# Altium PCB PCB3.PcbDoc (part 1 of 2)
Units mm, origin at the board's own origin, x right, y up, seen from the top; angles counter-clockwise.
Board outline 110 x 86 mm, 4 copper layers (Top Layer, Signal Layer 1, Signal Layer 2, Bottom Layer), stack 1.466 mm thick; 201 components, 102 nets, 1236 pads, 354 vias.
Unrouted connection lines stored in the file: 1.
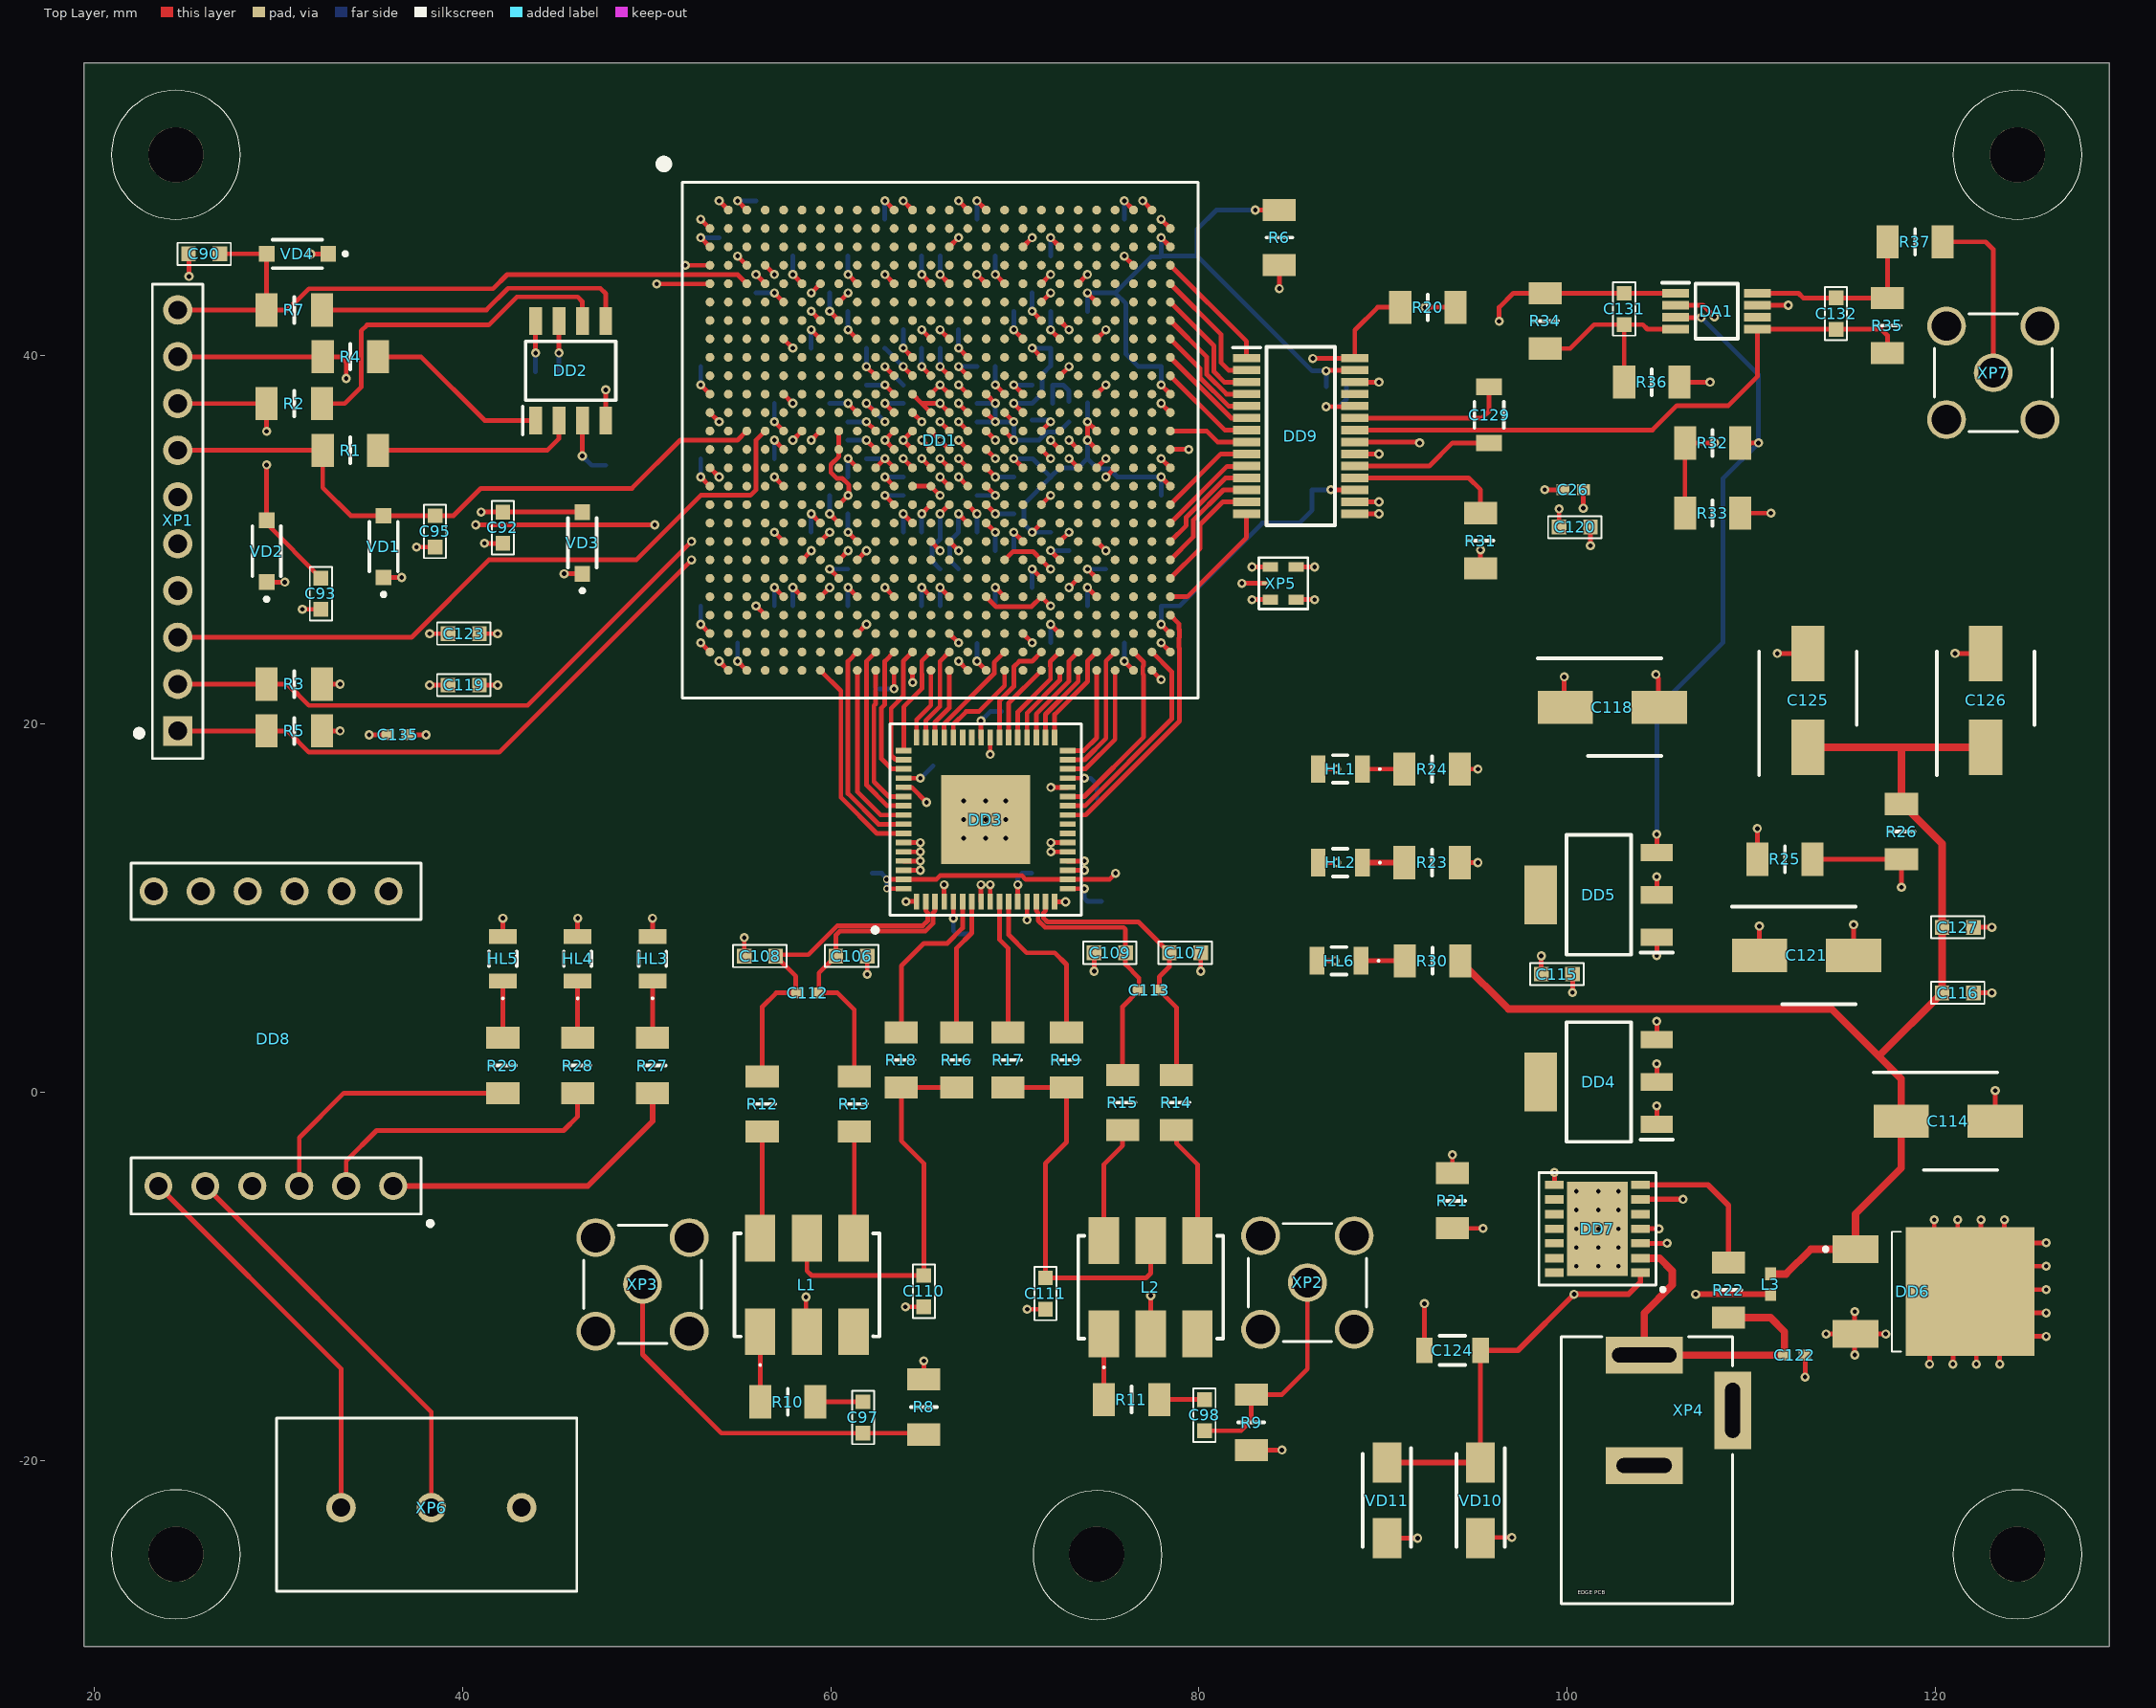
[diagram p0: Top Layer view]
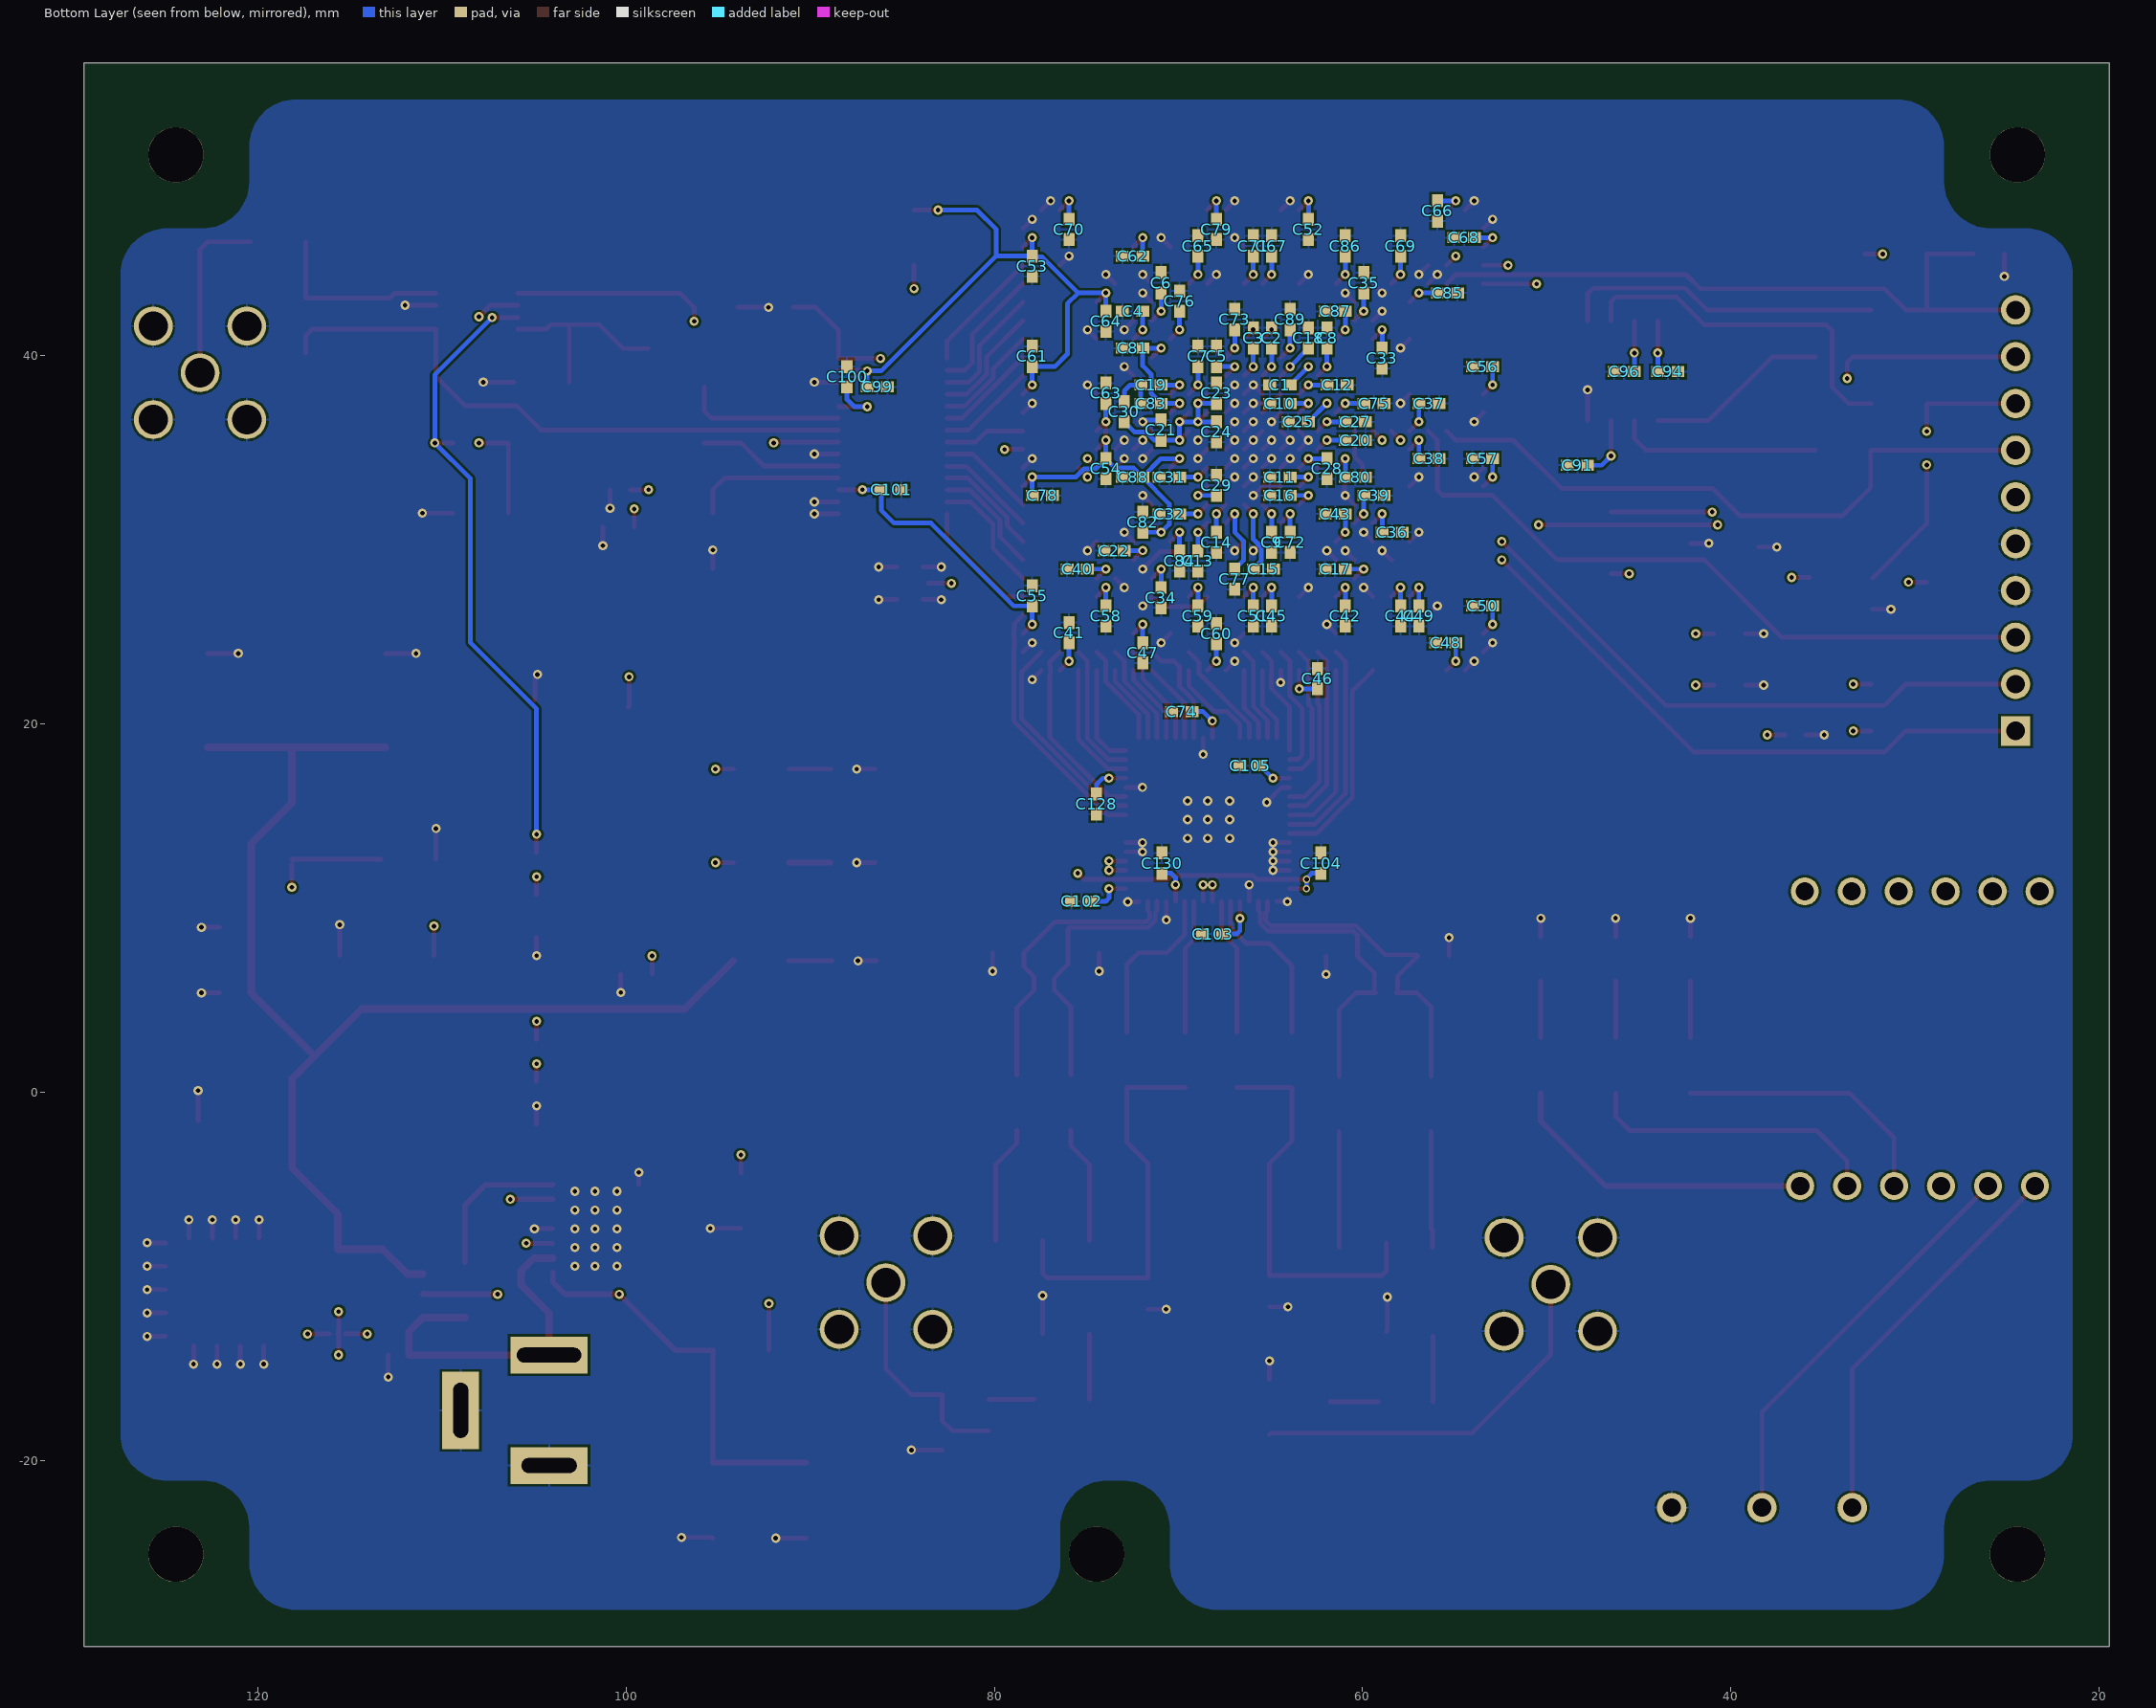
[diagram p1: Bottom Layer view, seen from below]
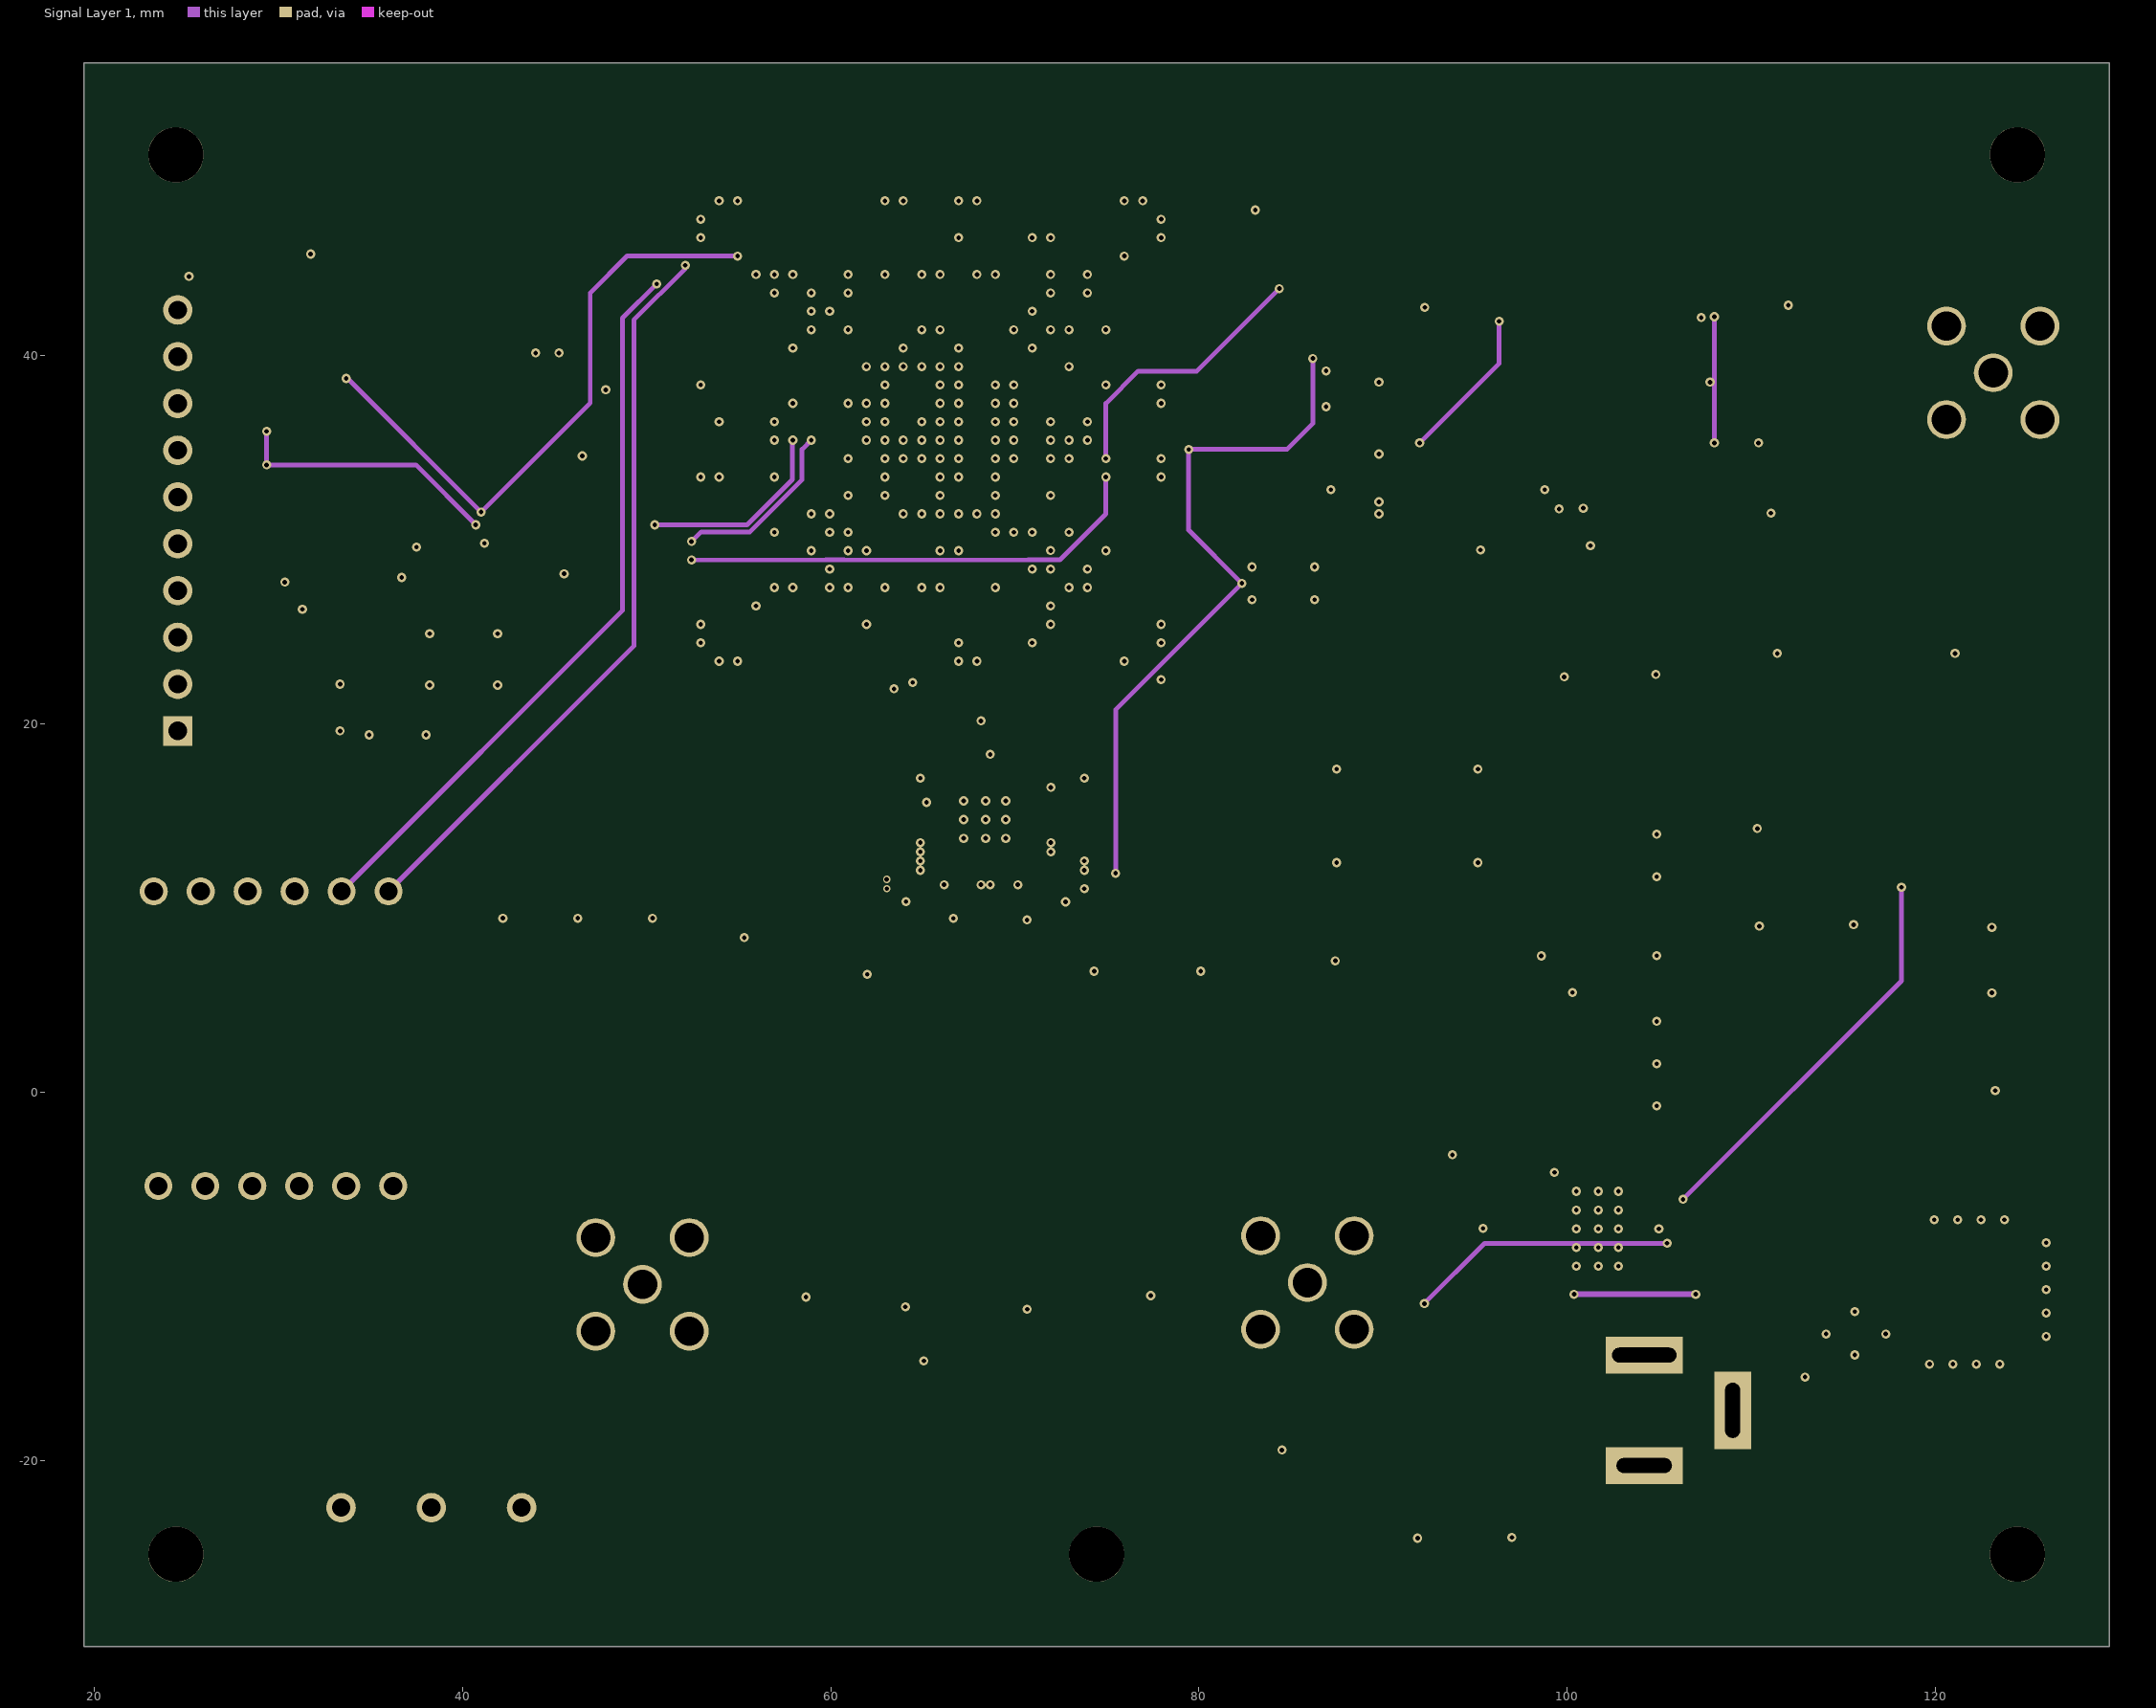
[diagram p2: Signal Layer 1]
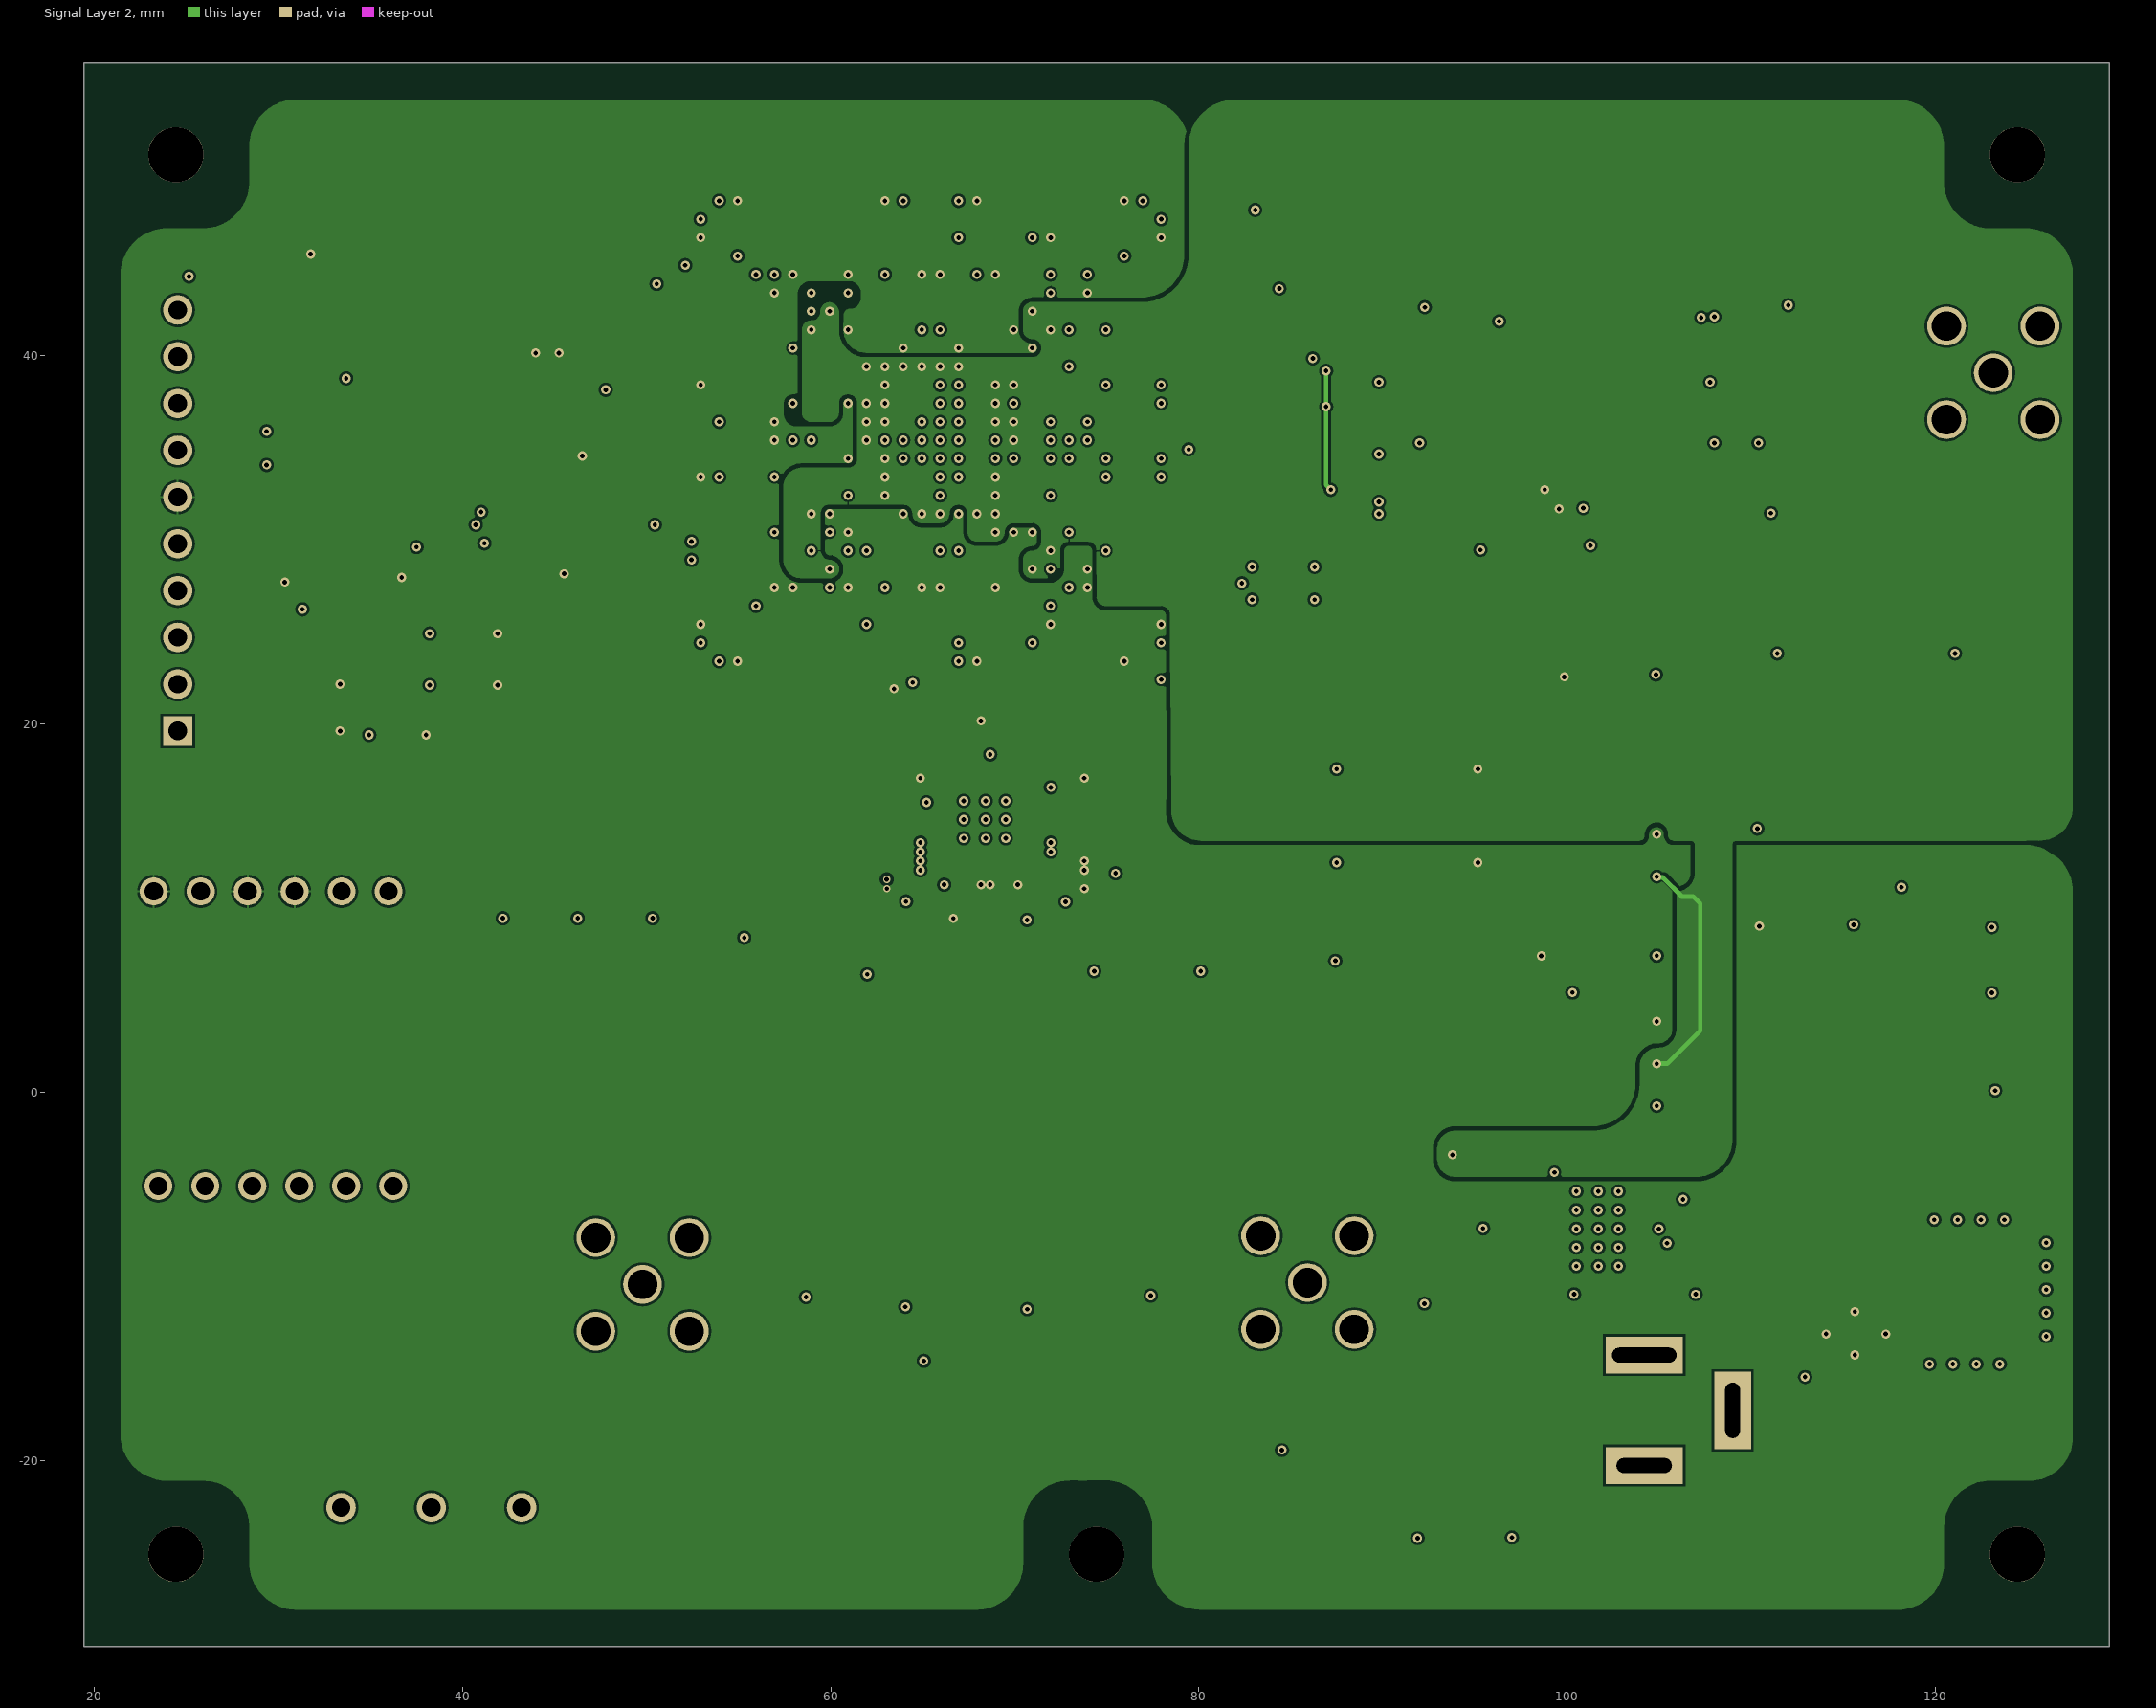
[diagram p3: Signal Layer 2]

## Layer stack, top to bottom
Top Solder: solder mask 0.015, Solder Resist, Dk 3.5
Top Layer: signal copper 0.018
Dielectric 1: prepreg 0.115, TG150, Dk 4.2
Signal Layer 1: signal copper 0.018
Dielectric 2: core 1.164, FR-4, Dk 4.2
Signal Layer 2: signal copper 0.018
Dielectric 3: prepreg 0.115, TG150, Dk 4.2
Bottom Layer: signal copper 0.018
Bottom Solder: solder mask 0.015, Solder Resist, Dk 3.5

## Board outline
19.44,-30.092 19.44,55.908 129.44,55.908 129.44,-30.092

## Design rules (kind name [scope] priority, off if disabled: settings)
BoardOutlineClearance [All] p1: gap=0.2 ignorepadtopadclearanceinfootprint=FALSE
Clearance [All] p1: gap=0.127 ignorepadtopadclearanceinfootprint=FALSE except(0.25: Arc-Hole Track-Hole SMDPad-Hole THPad-Hole Via-Hole Fill-Hole Poly-Hole Region-Hole Text-Hole; 0.254: Poly-Poly)
ComponentClearance [All] p1: gap=0.127 collisioncheckmode=3 verticalgap=0.127 showdistances=TRUE
DiffPairsRouting [All] p1: maxlimit=0.15 minlimit=0.15 mostfreqgap=0.15 toplayer_minwidth=0.15 toplayer_maxwidth=0.15 toplayer_prefwidth=0.15 midlayer1_minwidth=0.15 midlayer1_maxwidth=0.15 midlayer1_prefwidth=0.15 midlayer2_minwidth=0.15 midlayer2_maxwidth=0.15 midlayer2_prefwidth=0.15 bottomlayer_minwidth=0.15 bottomlayer_maxwidth=0.15 bottomlayer_prefwidth=0.15 maxuncoupledlength=12.7
Height [All] p1: minheight=0 maxheight=1816.048 prefheight=12.7
HoleSize [All] p1: absolutevalues=TRUE maxlimit=6.3 minlimit=0.3 maxpercent=80.000 minpercent=20.000
HoleToHoleClearance [All] p1: gap=0.25 allowstackedmicrovias=FALSE
MatchedLengths [All] p1: tolerance=5 checknetsindiffpair=TRUE checkdiffpairvsdiffpair=FALSE checkxsignals=FALSE checkothers=FALSE
MinimumAnnularRing [All] p1: minimumring=0.076
MinimumSolderMaskSliver [All] p1: minsoldermaskwidth=0
PlaneClearance [All] p1: clearance=0.127
PlaneConnect PlaneConnectPowerPads [InPadClass('PowerPads')] p1: planeconnectstyle=Direct reliefexpansion=0.508 reliefentries=4 reliefconductorwidth=0.254 reliefairgap=0.254
PlaneConnect [All] p2: pad.planeconnectstyle=Relief pad.reliefexpansion=0.3 pad.reliefentries=4 pad.reliefconductorwidth=0.127 pad.reliefairgap=0.127 via.planeconnectstyle=Direct via.reliefexpansion=0.3 via.reliefentries=4 via.reliefconductorwidth=0.127 via.reliefairgap=0.127
PolygonConnect PolygonConnectPowerPads [All vs (InPadClass('PowerPads'))] p1: connectstyle=Direct reliefconductorwidth=0.254 reliefentries=4 polygonreliefangle="90 Angle" airgapwidth=0.254
PolygonConnect [All] p2: thpad.connectstyle=Relief thpad.reliefconductorwidth=0.127 thpad.reliefentries=4 thpad.polygonreliefangle="90 Angle" thpad.airgapwidth=0.127 smdpad.connectstyle=Relief smdpad.reliefconductorwidth=0.127 smdpad.reliefentries=4 smdpad.polygonreliefangle="90 Angle" smdpad.airgapwidth=0.127 via.connectstyle=Direct via.reliefconductorwidth=0.127 via.reliefentries=4 via.polygonreliefangle="90 Angle" via.airgapwidth=0.127
RoutingVias [All] p1: holewidth=0.3 width=0.6 viastyle="Through Hole" minholewidth=0.1 minwidth=0.5 maxholewidth=0.6 maxwidth=6.6
SilkToSilkClearance [All] p1: silktosilkclearance=0
SilkToSolderMaskClearance [IsPad] p1: minsilkscreentomaskgap=0.127 clearancetoexposedcopper=TRUE
SolderMaskExpansion [All] p1: expansion=0.075 istentingtop=FALSE
Width [All] p1: maxlimit=25.4 minlimit=0.127 preferedwidth=0.127 midlayer1_maxwidth=0.254 midlayer2_maxwidth=0.254 minimp=50.000000 maximp=50.000000 favimp=50.000000
20 further rules are at their usual default settings.

## Classes and differential pairs
component class ADC: C97 C98 C99 C100 C101 C102 C103 C104 C105 C106 C107 C108 C109 C110 C111 C112 C113 DD3 L1 L2 R8 R9 R10 R11 R12 R13 R14 R15 R16 R17 R18 R19 XP2 XP3
component class Flash: C90 C91 C92 C93 C94 C95 C96 DD1 DD2 R1 R2 R3 R4 R5 R6 R7 VD1 VD2 VD3 VD4 XP1
component class FPGA: C1 C2 C3 C4 C5 C6 C7 C8 C9 C10 C11 C12 C13 C14 C15 C16 C17 C18 C19 C20 C21 C22 C23 C24 C25 C26 C27 C28 C29 C30 C31 C32 C33 C34 C35 C36 C37 C38 C39 C40 C41 C42 C43 C44 C45 C46 C47 C48 C49 C50 C51 C52 C53 C54 C55 C56 C57 C58 C59 C60 C61 C62 C63 C64 C65 C66 C67 C68 C69 C70 C71 C72 C73 C74 C75 C76 C77 C78 C79 C80 C81 C82 C83 C84 C85 C86 C87 C88 C89
component class Power: C114 C115 C116 C118 C119 C120 C121 C122 C123 C124 C125 C126 C127 DD4 DD5 DD6 DD7 DD8 HL1 HL2 HL3 HL4 HL5 HL6 L3 R20 R21 R22 R23 R24 R25 R26 R27 R28 R29 R30 VD10 VD11 XP4 XP5 XP6
component class DAC: C128 C129 C130 C131 C132 C135 DA1 DD9 R31 R32 R33 R34 R35 R36 R37 XP7
differential pair MIXA1: +MIXA1_P -MIXA1_N
differential pair MIXA: +MIXA_P -MIXA_N
differential pair MIXB: +MIXB_P -MIXB_N
differential pair MIXB1: +MIXB1_P -MIXB1_N

## Components (designator, comment, footprint, x,y, rotation, side; value= is the part's Value field where it differs from the comment)
C1 "0,1мк" RESC1005X35N 64.49,38.408 r0 bottom
C2 "0,1мк" RESC1005X35N 64.94,40.958 r90 bottom
C3 "0,1мк" RESC1005X35N 65.94,40.958 r90 bottom
C4 "0,1мк" RESC1005X35N 72.49,42.408 r0 bottom
C5 "0,1мк" RESC1005X35N 67.94,39.958 r90 bottom
C6 "0,1мк" RESC1005X35N 70.94,43.958 r90 bottom
C7 "0,1мк" RESC1005X35N 68.94,39.958 r90 bottom
C8 "0,1мк" RESC1005X35N 61.94,40.958 r90 bottom
C9 "0,1мк" RESC1005X35N 64.94,29.858 r270 bottom
C10 "0,1мк" RESC1005X35N 64.49,37.408 r0 bottom
C11 "0,1мк" RESC1005X35N 64.49,33.408 r0 bottom
C12 "0,1мк" RESC1005X35N 61.39,38.408 r180 bottom
C13 "0,1мк" RESC1005X35N 68.94,28.858 r270 bottom
C14 "0,1мк" RESC1005X35N 67.94,29.858 r270 bottom
C15 "0,1мк" RESC1005X35N 65.39,28.408 r180 bottom
C16 "0,1мк" RESC1005X35N 64.49,32.408 r0 bottom
C17 "0,1мк" RESC1005X35N 61.49,28.408 r0 bottom
C18 "0,1мк" RESC1005X35N 62.94,40.958 r90 bottom
C19 "0,1мк" RESC1005X35N 71.49,38.408 r0 bottom
C20 "0,1мк" RESC1005X35N 60.39,35.408 r180 bottom
C21 "0,1мк" RESC1005X35N 70.94,35.958 r90 bottom
C22 "0,1мк" RESC1005X35N 73.49,29.408 r0 bottom
C23 "0,1мк" RESC1005X35N 67.94,37.958 r90 bottom
C24 "0,1мк" RESC1005X35N 67.94,35.858 r270 bottom
C25 "0,1мк" RESC1005X35N 63.49,36.408 r0 bottom
C26 "0,1мк" RESC1005X35N 100.314,32.718 r0 top
C27 "0,1мк" RESC1005X35N 60.39,36.408 r180 bottom
C28 "0,1мк" RESC1005X35N 61.94,33.858 r270 bottom
C29 "0,1мк" RESC1005X35N 67.94,32.958 r90 bottom
C30 "0,1мк" RESC1005X35N 72.94,36.958 r90 bottom
C31 "0,1мк" RESC1005X35N 70.49,33.408 r0 bottom
C32 "0,1мк" RESC1005X35N 70.49,31.408 r0 bottom
C33 "0,1мк" RESC1005X35N 58.94,39.858 r270 bottom
C34 "0,1мк" RESC1005X35N 70.94,26.858 r270 bottom
C35 "0,1мк" RESC1005X35N 59.94,43.958 r90 bottom
C36 "0,1мк" RESC1005X35N 58.39,30.408 r180 bottom
C37 "0,1мк" RESC1005X35N 56.39,37.408 r180 bottom
C38 "0,1мк" RESC1005X35N 56.39,34.408 r180 bottom
C39 "0,1мк" RESC1005X35N 59.39,32.408 r180 bottom
C40 "0,1мк" RESC1005X35N 75.49,28.408 r0 bottom locked
C41 "0,1мк" RESC1005X35N 75.94,24.958 r90 bottom
C42 "0,1мк" RESC1005X35N 60.94,25.858 r270 bottom
C43 "0,1мк" RESC1005X35N 61.49,31.408 r0 bottom
C44 "0,1мк" RESC1005X35N 57.94,25.858 r270 bottom
C45 "0,1мк" RESC1005X35N 64.94,25.858 r270 bottom
C46 "0,1мк" RESC1005X35N 62.44,22.458 r90 bottom
C47 "0,1мк" RESC1005X35N 71.94,23.858 r270 bottom
C48 "0,1мк" RESC1005X35N 55.49,24.408 r0 bottom
C49 "0,1мк" RESC1005X35N 56.94,25.858 r270 bottom
C50 "0,1мк" RESC1005X35N 53.49,26.408 r0 bottom
C51 "0,1мк" RESC1005X35N 65.94,25.858 r270 bottom
C52 "0,1мк" RESC1005X35N 62.94,46.858 r270 bottom
C53 "0,1мк" RESC1005X35N 77.94,44.858 r270 bottom
C54 "0,1мк" RESC1005X35N 73.94,33.858 r270 bottom
C55 "0,1мк" RESC1005X35N 77.94,26.958 r90 bottom
C56 "0,1мк" RESC1005X35N 53.49,39.408 r0 bottom
C57 "0,1мк" RESC1005X35N 53.49,34.408 r0 bottom
C58 "0,1мк" RESC1005X35N 73.94,25.858 r270 bottom
C59 "0,1мк" RESC1005X35N 68.94,25.858 r270 bottom
C60 "0,1мк" RESC1005X35N 67.94,24.908 r90 bottom
C61 "0,1мк" RESC1005X35N 77.94,39.958 r90 bottom
C62 "0,1мк" RESC1005X35N 72.49,45.408 r0 bottom
C63 "0,1мк" RESC1005X35N 73.94,37.958 r90 bottom
C64 "0,1мк" RESC1005X35N 73.94,41.858 r270 bottom
C65 "0,1мк" RESC1005X35N 68.94,45.958 r90 bottom
C66 "0,1мк" RESC1005X35N 55.94,47.858 r270 bottom
C67 "0,1мк" RESC1005X35N 64.94,45.958 r90 bottom
C68 "0,1мк" RESC1005X35N 54.49,46.408 r0 bottom
C69 "0,1мк" RESC1005X35N 57.94,45.958 r90 bottom
C70 "0,1мк" RESC1005X35N 75.94,46.858 r270 bottom
C71 "0,1мк" RESC1005X35N 65.94,45.958 r90 bottom
C72 "0,1мк" RESC1005X35N 63.94,29.858 r270 bottom
C73 "0,1мк" RESC1005X35N 66.94,41.958 r90 bottom
C74 "0,1мк" RESC1005X35N 69.819,20.675 r0 bottom
C75 "0,1мк" RESC1005X35N 59.39,37.408 r180 bottom
C76 "0,1мк" RESC1005X35N 69.94,42.958 r90 bottom
C77 "0,1мк" RESC1005X35N 66.94,27.858 r270 bottom
C78 "0,1мк" RESC1005X35N 77.39,32.408 r180 bottom
C79 "0,1мк" RESC1005X35N 67.94,46.858 r270 bottom
C80 "0,1мк" RESC1005X35N 60.39,33.408 r180 bottom
C81 "0,1мк" RESC1005X35N 72.49,40.408 r0 bottom
C82 "0,1мк" RESC1005X35N 71.94,30.958 r90 bottom
C83 "0,1мк" RESC1005X35N 71.49,37.408 r0 bottom
C84 "0,1мк" RESC1005X35N 69.94,28.858 r270 bottom
C85 "0,1мк" RESC1005X35N 55.39,43.408 r180 bottom
C86 "0,1мк" RESC1005X35N 60.94,45.958 r90 bottom
C87 "0,1мк" RESC1005X35N 61.49,42.408 r0 bottom
C88 "0,1мк" RESC1005X35N 72.49,33.408 r0 bottom
C89 "0,1мк" RESC1005X35N 63.94,41.958 r90 bottom
C90 "0,1мк" 0603 26.828,45.529 r180 top
C91 "0,1мк" RESC1005X35N 48.333,34.049 r0 bottom
C92 "0,1мк" 0603 42.195,31.509 r270 top
C93 "0,1мк" 0603 32.315,27.925 r270 top
C94 "0,1мк" RESC1005X35N 43.423,39.129 r180 bottom
C95 "0,1мк" 0603 38.512,31.305 r270 top
C96 "0,1мк" RESC1005X35N 45.793,39.129 r0 bottom
C97 "0,1мк" 0603 61.754,-18.512 r90 top
C98 "0,1мк" 0603 80.296,-18.385 r90 top
C99 "0,1мк" RESC1005X35N 86.35,38.306 r180 bottom
C100 "0,1мк" RESC1005X35N 88.002,38.859 r90 bottom
C101 "0,1мк" RESC1005X35N 85.588,32.718 r180 bottom
C102 "0,1мк" RESC1005X35N 75.258,10.366 r0 bottom
C103 "0,1мк" RESC1005X35N 68.146,8.588 r0 bottom
C104 "0,1мк" RESC1005X35N 62.262,12.44 r90 bottom
C105 "0,1мк" RESC1005X35N 66.114,17.732 r0 bottom
C106 "0,1мк" 0603 60.282,7.4 r0 top
C107 "0,1мк" 0603 78.391,7.572 r0 top
C108 "0,1мк" 0603 55.305,7.395 r0 top
C109 "0,1мк" 0603 76.004,7.572 r180 top
C110 "0,1мк" 0603 65.056,-11.654 r90 top
C111 "0,1мк" 0603 71.66,-10.081 r270 top
C112 "0,1мк" RESC1005X35N 58.732,5.4 r0 top
C113 "0,1мк" RESC1005X35N 77.29,5.54 r0 top
C114 "47мк/16B" CAPAE530X610N 120.682,-1.572 r0 top
C115 "0,1мк" 0603 98.582,6.414 r0 top
C116 "0,1мк" 0603 120.348,5.398 r0 top
C118 "220мк/6,3В" CAPAE530X610N 102.44,20.908 r0 top
C119 "0,1мк" 0603 40.925,22.111 r180 top
C120 "0,1мк" 0603 99.552,30.686 r0 top
C121 "220мк/6,3В" CAPAE530X610N 112.992,7.43 r0 top
C122 "0,1мк" RESC1005X35N 112.342,-14.272 r0 top
C123 "0,1мк" 0603 40.925,24.905 r180 top
C124 "0,01мк" ECPU1C154MA5 93.758,-14.018 r0 top
C125 "220мк/6,3В" CAPAE530X610N 113.062,21.278 r90 top
C126 "220мк/6,3В" CAPAE530X610N 122.714,21.278 r90 top
C127 "0,1мк" 0603 120.348,8.954 r0 top
C128 "0,1мк" RESC1005X35N 74.454,15.658 r270 bottom
C129 "*" ECPU1C154MA5 95.75,36.782 r270 top
C130 "0,1мк" RESC1005X35N 70.898,12.44 r90 bottom
C131 "0,1мк" 0603 103.084,43.386 r270 top
C132 "0,1мк" 0603 114.586,41.432 r90 top
C135 "0,1мк" RESC1005X35N 36.49,19.408 r180 top
DA1 "AD8132" SOP65P490X110-8N 108.103,42.411 r0 top
DD1 "EP2C35F6" BGA672CP100_26X26_2700X2700X240B60N 65.94,35.408 r0 top locked
DD2 "EPCS16SI8N" SOIC127P600X175-8N 45.878,39.179 r90 top
DD3 "AD9238BCPZRL-65" QFN50P900X900X80-65N-D 68.41,14.806 r90 top locked
DD4 "AME1117ACCTZ-ADJ/1A 1" SOT230P700X180-4N 101.704,0.558 r180 top
DD5 "AME1117ACCTZ-ADJ/1A 1" SOT230P700X180-4N 101.704,10.718 r180 top
DD6 "78D05AL-5V/1A" BD750L5FPCE2 123.622,-10.826 r270 top
DD7 "LM2676SD-ADJ" DFN500X600X100-15N 101.632,-7.414 r180 top
DD8 "UART_CAN" UART_CAN 36.24,-5.092 r180 top
DD9 "AD9764" SOP65P640X120-28N 85.52,35.635 r0 top locked
HL1 "TO-160BBC-BF" 15412085A9000 87.668,17.55 r180 top value=Синий
HL2 "TO-160BBC-BF" 15412085A9000 87.668,12.47 r180 top value=Синий
HL3 "TO-160BBC-BF" 15412085A9000 50.324,7.248 r90 top value=Синий
HL4 "TO-160BBC-BF" 15412085A9000 46.26,7.248 r90 top value=Синий
HL5 "TO-160BBC-BF" 15412085A9000 42.196,7.248 r90 top value=Синий
HL6 "TO-160BBC-BF" 15412085A9000 87.598,7.136 r180 top value=Синий
L1 "ADT2-1T-1P+" ADT1517 58.706,-10.462 r0 top
L2 "ADT2-1T-1P+" ADT1517 77.375,-10.589 r0 top
L3 "*" RESC1005X35N 111.03,-10.42 r90 top
R1 "*" RESC3216X75N 33.916,34.861 r180 top
R2 "*" RESC3216X75N 30.868,37.401 r180 top
R3 "*" RESC3216X75N 30.868,22.161 r0 top
R4 "*" RESC3216X75N 33.916,39.941 r180 top
R5 "*" RESC3216X75N 30.868,19.621 r0 top
R6 "*" RESC3216X75N 84.36,46.41 r90 top
R7 "*" RESC3216X75N 30.868,42.481 r180 top
R8 "*" RESC3216X75N 65.056,-17.09 r270 top
R9 "*" RESC3216X75N 82.836,-17.931 r90 top
R10 "*" RESC3216X75N 57.666,-16.812 r180 top
R11 "*" RESC3216X75N 76.335,-16.685 r180 top
R12 "*" RESC3216X75N 56.282,-0.64 r90 top
R13 "*" RESC3216X75N 61.282,-0.64 r90 top
R14 "*" RESC3216X75N 78.772,-0.556 r90 top
R15 "*" RESC3216X75N 75.851,-0.556 r90 top
R16 "*" RESC3216X75N 66.834,1.754 r90 top
R17 "*" RESC3216X75N 69.628,1.754 r90 top
R18 "*" RESC3216X75N 63.834,1.754 r90 top
R19 "*" RESC3216X75N 72.803,1.754 r90 top
R20 "*" RESC3216X75N 92.424,42.624 r180 top
R21 "*" RESC3216X75N 93.758,-5.89 r90 top
R22 "*" RESC3216X75N 108.744,-10.74 r90 top
R23 "*" RESC3216X75N 92.654,12.47 r0 top
R24 "*" RESC3216X75N 92.654,17.55 r0 top
R25 "*" RESC3216X75N 111.816,12.652 r0 top
R26 "*" RESC3216X75N 118.142,14.152 r90 top
R27 "*" RESC3216X75N 50.324,1.452 r270 top
R28 "*" RESC3216X75N 46.26,1.452 r270 top
R29 "*" RESC3216X75N 42.196,1.452 r270 top
R30 "*" RESC3216X75N 92.678,7.136 r0 top
R31 "*" RESC3216X75N 95.282,29.948 r90 top
R32 "*" RESC3216X75N 107.886,35.258 r0 top
R33 "*" RESC3216X75N 107.886,31.448 r180 top
R34 "*" RESC3216X75N 98.79,41.886 r270 top
R35 "*" RESC3216X75N 117.38,41.632 r90 top
R36 "*" RESC3216X75N 104.584,38.56 r180 top
R37 "*" RESC3216X75N 118.88,46.18 r0 top
VD1 "1N4148" 1N4148WVGS08 35.718,29.63 r90 top
VD2 "1N4148" 1N4148WVGS08 29.368,29.376 r90 top
VD3 "1N4148" 1N4148WVGS08 46.513,29.834 r90 top
VD4 "1N4148" 1N4148WVGS08 31.043,45.529 r180 top
VD10 "SS14" DIOM5026X262N 95.282,-22.164 r270 top
VD11 "SS14" DIOM5026X262N 90.202,-22.164 r270 top
XP1 "DS1021" PBS-10 24.542,31.051 r90 top
XP2 "MOLEX 73391" CONN_73391-0070_MOL 85.884,-10.335 r0 top
XP3 "MOLEX 73391" CONN_73391-0070_MOL 49.782,-10.434 r270 top
XP4 "DJK-02B" DJK-02B 106.572,-17.272 r270 top
XP5 "EXT_CLK" IPEX 84.513,30.686 r270 top
XP6 "header2" HEADER_2_PHOENIX 30.512,-17.955 r0 top
XP7 "MOLEX 73391" CONN_73391-0070_MOL 123.126,39.068 r0 top

## Footprints (in the part's own frame and the unit in brackets; to place one, negate y for a bottom-side part, rotate by r counter-clockwise, add the part's x,y. Pads: shape width x height; smd on the part's side, far side on the other; paste and mask are expansions set on the pad)
1N4148WVGS08 [mm]
  rect 0.85x0.85 smd: 1(-1.675,0) 2(1.675,0)
  silkscreen extent -2.7,-0.77 1.35,0.77, body extent -1.85,-0.77 1.85,0.77, height 1.26
0603 [mm]
  rect 0.8x0.8 smd: 1(0,0) 2(1.7,0)
  silkscreen extent -0.6,-0.6 2.3,0.6, body extent -0.01,-0.4 1.61,0.39, height 0.79
15412085A9000 [mm]
  rect 0.8x1.5 smd: 1(-1.2,0) 2(1.2,0)
  silkscreen extent -2.2,-0.75 0.4,0.75, body extent -1.5,-0.75 1.5,0.75, height 1.21
ADT1517 [mm]
  rect 1.65x2.54 smd: 1(-2.54,-2.54) 2(0,-2.54) 3(2.54,-2.54) 4(2.54,2.54) 5(0,2.54) 6(-2.54,2.54)
  silkscreen extent -3.94,-4.4 3.94,2.8, body extent -3.94,-3.64 3.94,3.64, height 2.94
BD750L5FPCE2 [mm]
  rect 1.5x2.5 smd: 1(-2.3,-7.98) 3(2.3,-7.98)
  rect 7x7 smd: 4(0,-1.75)
  silkscreen extent -3.25,-9.7 3.25,-5.5, body extent -3.25,-8.78 3.25,0.63, height 2.3
BGA672CP100_26X26_2700X2700X240B60N [mm]
  round 0.48 smd: A2(-11.5,12.5) A3(-10.5,12.5) A4(-9.5,12.5) A5(-8.5,12.5) A6(-7.5,12.5) A7(-6.5,12.5) A8(-5.5,12.5) A9(-4.5,12.5) A10(-3.5,12.5) A11(-2.5,12.5) A12(-1.5,12.5) A13(-0.5,12.5) A14(0.5,12.5) A15(1.5,12.5) A16(2.5,12.5) A17(3.5,12.5) A18(4.5,12.5) A19(5.5,12.5) A20(6.5,12.5) A21(7.5,12.5) A22(8.5,12.5) A23(9.5,12.5) A24(10.5,12.5) A25(11.5,12.5) AA1(-12.5,-7.5) AA2(-11.5,-7.5) AA3(-10.5,-7.5) AA4(-9.5,-7.5) AA5(-8.5,-7.5) AA6(-7.5,-7.5) AA7(-6.5,-7.5) AA8(-5.5,-7.5) AA9(-4.5,-7.5) AA10(-3.5,-7.5) AA11(-2.5,-7.5) AA12(-1.5,-7.5) AA13(-0.5,-7.5) AA14(0.5,-7.5) AA15(1.5,-7.5) AA16(2.5,-7.5) AA17(3.5,-7.5) AA18(4.5,-7.5) AA19(5.5,-7.5) AA20(6.5,-7.5) AA21(7.5,-7.5) AA22(8.5,-7.5) AA23(9.5,-7.5) AA24(10.5,-7.5) AA25(11.5,-7.5) AA26(12.5,-7.5) AB1(-12.5,-8.5) AB2(-11.5,-8.5) AB3(-10.5,-8.5) AB4(-9.5,-8.5) AB5(-8.5,-8.5) AB6(-7.5,-8.5) AB7(-6.5,-8.5) AB8(-5.5,-8.5) AB9(-4.5,-8.5) AB10(-3.5,-8.5) AB11(-2.5,-8.5) AB12(-1.5,-8.5) AB13(-0.5,-8.5) AB14(0.5,-8.5) AB15(1.5,-8.5) AB16(2.5,-8.5) AB17(3.5,-8.5) AB18(4.5,-8.5) AB19(5.5,-8.5) AB20(6.5,-8.5) AB21(7.5,-8.5) AB22(8.5,-8.5) AB23(9.5,-8.5) AB24(10.5,-8.5) AB25(11.5,-8.5) AB26(12.5,-8.5) AC1(-12.5,-9.5) AC2(-11.5,-9.5) AC3(-10.5,-9.5) AC4(-9.5,-9.5) AC5(-8.5,-9.5) AC6(-7.5,-9.5) AC7(-6.5,-9.5) AC8(-5.5,-9.5) AC9(-4.5,-9.5) AC10(-3.5,-9.5) AC11(-2.5,-9.5) AC12(-1.5,-9.5) AC13(-0.5,-9.5) AC14(0.5,-9.5) AC15(1.5,-9.5) AC16(2.5,-9.5) AC17(3.5,-9.5) AC18(4.5,-9.5) AC19(5.5,-9.5) AC20(6.5,-9.5) AC21(7.5,-9.5) AC22(8.5,-9.5) AC23(9.5,-9.5) AC24(10.5,-9.5) AC25(11.5,-9.5) AC26(12.5,-9.5) AD1(-12.5,-10.5) AD2(-11.5,-10.5) AD3(-10.5,-10.5) AD4(-9.5,-10.5) AD5(-8.5,-10.5) AD6(-7.5,-10.5) AD7(-6.5,-10.5) AD8(-5.5,-10.5) AD9(-4.5,-10.5) AD10(-3.5,-10.5) AD11(-2.5,-10.5) AD12(-1.5,-10.5) AD13(-0.5,-10.5) AD14(0.5,-10.5) AD15(1.5,-10.5) AD16(2.5,-10.5) AD17(3.5,-10.5) AD18(4.5,-10.5) AD19(5.5,-10.5) AD20(6.5,-10.5) AD21(7.5,-10.5) AD22(8.5,-10.5) AD23(9.5,-10.5) AD24(10.5,-10.5) AD25(11.5,-10.5) AD26(12.5,-10.5) AE1(-12.5,-11.5) AE2(-11.5,-11.5) AE3(-10.5,-11.5) AE4(-9.5,-11.5) AE5(-8.5,-11.5) AE6(-7.5,-11.5) AE7(-6.5,-11.5) AE8(-5.5,-11.5) AE9(-4.5,-11.5) AE10(-3.5,-11.5) AE11(-2.5,-11.5) AE12(-1.5,-11.5) AE13(-0.5,-11.5) AE14(0.5,-11.5) AE15(1.5,-11.5) AE16(2.5,-11.5) AE17(3.5,-11.5) AE18(4.5,-11.5) AE19(5.5,-11.5) AE20(6.5,-11.5) AE21(7.5,-11.5) AE22(8.5,-11.5) AE23(9.5,-11.5) AE24(10.5,-11.5) AE25(11.5,-11.5) AE26(12.5,-11.5) AF2(-11.5,-12.5) AF3(-10.5,-12.5) AF4(-9.5,-12.5) AF5(-8.5,-12.5) AF6(-7.5,-12.5) AF7(-6.5,-12.5) AF8(-5.5,-12.5) AF9(-4.5,-12.5) AF10(-3.5,-12.5) AF11(-2.5,-12.5) AF12(-1.5,-12.5) AF13(-0.5,-12.5) AF14(0.5,-12.5) AF15(1.5,-12.5) AF16(2.5,-12.5) AF17(3.5,-12.5) AF18(4.5,-12.5) AF19(5.5,-12.5) AF20(6.5,-12.5) AF21(7.5,-12.5) AF22(8.5,-12.5) AF23(9.5,-12.5) AF24(10.5,-12.5) AF25(11.5,-12.5) B1(-12.5,11.5) B2(-11.5,11.5) B3(-10.5,11.5) B4(-9.5,11.5) B5(-8.5,11.5) B6(-7.5,11.5) B7(-6.5,11.5) B8(-5.5,11.5) B9(-4.5,11.5) B10(-3.5,11.5) B11(-2.5,11.5) B12(-1.5,11.5) B13(-0.5,11.5) B14(0.5,11.5) B15(1.5,11.5) B16(2.5,11.5) B17(3.5,11.5) B18(4.5,11.5) B19(5.5,11.5) B20(6.5,11.5) B21(7.5,11.5) B22(8.5,11.5) B23(9.5,11.5) B24(10.5,11.5) B25(11.5,11.5) B26(12.5,11.5) C1(-12.5,10.5) C2(-11.5,10.5) C3(-10.5,10.5) C4(-9.5,10.5) C5(-8.5,10.5) C6(-7.5,10.5) C7(-6.5,10.5) C8(-5.5,10.5) C9(-4.5,10.5) C10(-3.5,10.5) C11(-2.5,10.5) C12(-1.5,10.5) C13(-0.5,10.5) C14(0.5,10.5) C15(1.5,10.5) C16(2.5,10.5) C17(3.5,10.5) C18(4.5,10.5) C19(5.5,10.5) C20(6.5,10.5) C21(7.5,10.5) C22(8.5,10.5) C23(9.5,10.5) C24(10.5,10.5) C25(11.5,10.5) C26(12.5,10.5) D1(-12.5,9.5) D2(-11.5,9.5) D3(-10.5,9.5) D4(-9.5,9.5) D5(-8.5,9.5) D6(-7.5,9.5) D7(-6.5,9.5) D8(-5.5,9.5) D9(-4.5,9.5) D10(-3.5,9.5) D11(-2.5,9.5) D12(-1.5,9.5) D13(-0.5,9.5) D14(0.5,9.5) D15(1.5,9.5) D16(2.5,9.5) D17(3.5,9.5) D18(4.5,9.5) D19(5.5,9.5) D20(6.5,9.5) D21(7.5,9.5) D22(8.5,9.5) D23(9.5,9.5) D24(10.5,9.5) D25(11.5,9.5) D26(12.5,9.5) E1(-12.5,8.5) E2(-11.5,8.5) E3(-10.5,8.5) E4(-9.5,8.5) E5(-8.5,8.5) E6(-7.5,8.5) E7(-6.5,8.5) E8(-5.5,8.5) E9(-4.5,8.5) E10(-3.5,8.5) E11(-2.5,8.5) E12(-1.5,8.5) E13(-0.5,8.5) E14(0.5,8.5) E15(1.5,8.5) E16(2.5,8.5) E17(3.5,8.5) E18(4.5,8.5) E19(5.5,8.5) E20(6.5,8.5) E21(7.5,8.5) E22(8.5,8.5) E23(9.5,8.5) E24(10.5,8.5) E25(11.5,8.5) E26(12.5,8.5) F1(-12.5,7.5) F2(-11.5,7.5) F3(-10.5,7.5) F4(-9.5,7.5) F5(-8.5,7.5) F6(-7.5,7.5) F7(-6.5,7.5) F8(-5.5,7.5) F9(-4.5,7.5) F10(-3.5,7.5) F11(-2.5,7.5) F12(-1.5,7.5) F13(-0.5,7.5) F14(0.5,7.5) F15(1.5,7.5) F16(2.5,7.5) F17(3.5,7.5) F18(4.5,7.5) F19(5.5,7.5) F20(6.5,7.5) F21(7.5,7.5) F22(8.5,7.5) F23(9.5,7.5) F24(10.5,7.5) F25(11.5,7.5) F26(12.5,7.5) G1(-12.5,6.5) G2(-11.5,6.5) G3(-10.5,6.5) G4(-9.5,6.5) G5(-8.5,6.5) G6(-7.5,6.5) G7(-6.5,6.5) G8(-5.5,6.5) G9(-4.5,6.5) G10(-3.5,6.5) G11(-2.5,6.5) G12(-1.5,6.5) G13(-0.5,6.5) G14(0.5,6.5) G15(1.5,6.5) G16(2.5,6.5) G17(3.5,6.5) G18(4.5,6.5) G19(5.5,6.5) G20(6.5,6.5) G21(7.5,6.5) G22(8.5,6.5) G23(9.5,6.5) G24(10.5,6.5) G25(11.5,6.5) G26(12.5,6.5) H1(-12.5,5.5) H2(-11.5,5.5) H3(-10.5,5.5) H4(-9.5,5.5) H5(-8.5,5.5) H6(-7.5,5.5) H7(-6.5,5.5) H8(-5.5,5.5) H9(-4.5,5.5) H10(-3.5,5.5) H11(-2.5,5.5) H12(-1.5,5.5) H13(-0.5,5.5) H14(0.5,5.5) H15(1.5,5.5) H16(2.5,5.5) H17(3.5,5.5) H18(4.5,5.5) H19(5.5,5.5) H20(6.5,5.5) H21(7.5,5.5) H22(8.5,5.5) H23(9.5,5.5) H24(10.5,5.5) H25(11.5,5.5) H26(12.5,5.5) J1(-12.5,4.5) J2(-11.5,4.5) J3(-10.5,4.5) J4(-9.5,4.5) J5(-8.5,4.5) J6(-7.5,4.5) J7(-6.5,4.5) J8(-5.5,4.5) J9(-4.5,4.5) J10(-3.5,4.5) J11(-2.5,4.5) J12(-1.5,4.5) J13(-0.5,4.5) J14(0.5,4.5) J15(1.5,4.5) J16(2.5,4.5) J17(3.5,4.5) J18(4.5,4.5) J19(5.5,4.5) J20(6.5,4.5) J21(7.5,4.5) J22(8.5,4.5) J23(9.5,4.5) J24(10.5,4.5) J25(11.5,4.5) J26(12.5,4.5) K1(-12.5,3.5) K2(-11.5,3.5) K3(-10.5,3.5) K4(-9.5,3.5) K5(-8.5,3.5) K6(-7.5,3.5) K7(-6.5,3.5) K8(-5.5,3.5) K9(-4.5,3.5) K10(-3.5,3.5) K11(-2.5,3.5) K12(-1.5,3.5) K13(-0.5,3.5) K14(0.5,3.5) K15(1.5,3.5) K16(2.5,3.5) K17(3.5,3.5) K18(4.5,3.5) K19(5.5,3.5) K20(6.5,3.5) K21(7.5,3.5) K22(8.5,3.5) K23(9.5,3.5) K24(10.5,3.5) K25(11.5,3.5) K26(12.5,3.5) L1(-12.5,2.5) L2(-11.5,2.5) L3(-10.5,2.5) L4(-9.5,2.5) L5(-8.5,2.5) L6(-7.5,2.5) L7(-6.5,2.5) L8(-5.5,2.5) L9(-4.5,2.5) L10(-3.5,2.5) L11(-2.5,2.5) L12(-1.5,2.5) L13(-0.5,2.5) L14(0.5,2.5) L15(1.5,2.5) L16(2.5,2.5) L17(3.5,2.5) L18(4.5,2.5) L19(5.5,2.5) L20(6.5,2.5) L21(7.5,2.5) L22(8.5,2.5) L23(9.5,2.5) L24(10.5,2.5) L25(11.5,2.5) L26(12.5,2.5) M1(-12.5,1.5) M2(-11.5,1.5) M3(-10.5,1.5) M4(-9.5,1.5) M5(-8.5,1.5) M6(-7.5,1.5) M7(-6.5,1.5) M8(-5.5,1.5) M9(-4.5,1.5) M10(-3.5,1.5) M11(-2.5,1.5) M12(-1.5,1.5) M13(-0.5,1.5) M14(0.5,1.5) M15(1.5,1.5) M16(2.5,1.5) M17(3.5,1.5) M18(4.5,1.5) M19(5.5,1.5) M20(6.5,1.5) M21(7.5,1.5) M22(8.5,1.5) M23(9.5,1.5) M24(10.5,1.5) M25(11.5,1.5) M26(12.5,1.5) N1(-12.5,0.5) N2(-11.5,0.5) N3(-10.5,0.5) N4(-9.5,0.5) N5(-8.5,0.5) N6(-7.5,0.5) N7(-6.5,0.5) N8(-5.5,0.5) N9(-4.5,0.5) N10(-3.5,0.5) N11(-2.5,0.5) N12(-1.5,0.5) N13(-0.5,0.5) N14(0.5,0.5) N15(1.5,0.5) N16(2.5,0.5) N17(3.5,0.5) N18(4.5,0.5) N19(5.5,0.5) N20(6.5,0.5) N21(7.5,0.5) N22(8.5,0.5) N23(9.5,0.5) N24(10.5,0.5) N25(11.5,0.5) N26(12.5,0.5) P1(-12.5,-0.5) P2(-11.5,-0.5) P3(-10.5,-0.5) P4(-9.5,-0.5) P5(-8.5,-0.5) P6(-7.5,-0.5) P7(-6.5,-0.5) P8(-5.5,-0.5) P9(-4.5,-0.5) P10(-3.5,-0.5) P11(-2.5,-0.5) P12(-1.5,-0.5) P13(-0.5,-0.5) P14(0.5,-0.5) P15(1.5,-0.5) P16(2.5,-0.5) P17(3.5,-0.5) P18(4.5,-0.5) P19(5.5,-0.5) P20(6.5,-0.5) P21(7.5,-0.5) P22(8.5,-0.5) P23(9.5,-0.5) P24(10.5,-0.5) P25(11.5,-0.5) P26(12.5,-0.5) R1(-12.5,-1.5) R2(-11.5,-1.5) R3(-10.5,-1.5) R4(-9.5,-1.5) R5(-8.5,-1.5) R6(-7.5,-1.5) R7(-6.5,-1.5) R8(-5.5,-1.5) R9(-4.5,-1.5) R10(-3.5,-1.5) R11(-2.5,-1.5) R12(-1.5,-1.5) R13(-0.5,-1.5) R14(0.5,-1.5) R15(1.5,-1.5) R16(2.5,-1.5) R17(3.5,-1.5) R18(4.5,-1.5) R19(5.5,-1.5) R20(6.5,-1.5) R21(7.5,-1.5) R22(8.5,-1.5) R23(9.5,-1.5) R24(10.5,-1.5) R25(11.5,-1.5) R26(12.5,-1.5) T1(-12.5,-2.5) T2(-11.5,-2.5) T3(-10.5,-2.5) T4(-9.5,-2.5) T5(-8.5,-2.5) T6(-7.5,-2.5) T7(-6.5,-2.5) T8(-5.5,-2.5) T9(-4.5,-2.5) T10(-3.5,-2.5) T11(-2.5,-2.5) T12(-1.5,-2.5) T13(-0.5,-2.5) T14(0.5,-2.5) T15(1.5,-2.5) T16(2.5,-2.5) T17(3.5,-2.5) T18(4.5,-2.5) T19(5.5,-2.5) T20(6.5,-2.5) T21(7.5,-2.5) T22(8.5,-2.5) T23(9.5,-2.5) T24(10.5,-2.5) T25(11.5,-2.5) T26(12.5,-2.5) U1(-12.5,-3.5) U2(-11.5,-3.5) U3(-10.5,-3.5) U4(-9.5,-3.5) U5(-8.5,-3.5) U6(-7.5,-3.5) U7(-6.5,-3.5) U8(-5.5,-3.5) U9(-4.5,-3.5) U10(-3.5,-3.5) U11(-2.5,-3.5) U12(-1.5,-3.5) U13(-0.5,-3.5) U14(0.5,-3.5) U15(1.5,-3.5) U16(2.5,-3.5) U17(3.5,-3.5) U18(4.5,-3.5) U19(5.5,-3.5) U20(6.5,-3.5) U21(7.5,-3.5) U22(8.5,-3.5) U23(9.5,-3.5) U24(10.5,-3.5) U25(11.5,-3.5) U26(12.5,-3.5) V1(-12.5,-4.5) V2(-11.5,-4.5) V3(-10.5,-4.5) V4(-9.5,-4.5) V5(-8.5,-4.5) V6(-7.5,-4.5) V7(-6.5,-4.5) V8(-5.5,-4.5) V9(-4.5,-4.5) V10(-3.5,-4.5) V11(-2.5,-4.5) V12(-1.5,-4.5) V13(-0.5,-4.5) V14(0.5,-4.5) V15(1.5,-4.5) V16(2.5,-4.5) V17(3.5,-4.5) V18(4.5,-4.5) V19(5.5,-4.5) V20(6.5,-4.5) V21(7.5,-4.5) V22(8.5,-4.5) V23(9.5,-4.5) V24(10.5,-4.5) V25(11.5,-4.5) V26(12.5,-4.5) W1(-12.5,-5.5) W2(-11.5,-5.5) W3(-10.5,-5.5) W4(-9.5,-5.5) W5(-8.5,-5.5) W6(-7.5,-5.5) W7(-6.5,-5.5) W8(-5.5,-5.5) W9(-4.5,-5.5) W10(-3.5,-5.5) W11(-2.5,-5.5) W12(-1.5,-5.5) W13(-0.5,-5.5) W14(0.5,-5.5) W15(1.5,-5.5) W16(2.5,-5.5) W17(3.5,-5.5) W18(4.5,-5.5) W19(5.5,-5.5) W20(6.5,-5.5) W21(7.5,-5.5) W22(8.5,-5.5) W23(9.5,-5.5) W24(10.5,-5.5) W25(11.5,-5.5) W26(12.5,-5.5) Y1(-12.5,-6.5) Y2(-11.5,-6.5) Y3(-10.5,-6.5) Y4(-9.5,-6.5) Y5(-8.5,-6.5) Y6(-7.5,-6.5) Y7(-6.5,-6.5) Y8(-5.5,-6.5) Y9(-4.5,-6.5) Y10(-3.5,-6.5) Y11(-2.5,-6.5) Y12(-1.5,-6.5) Y13(-0.5,-6.5) Y14(0.5,-6.5) Y15(1.5,-6.5) Y16(2.5,-6.5) Y17(3.5,-6.5) Y18(4.5,-6.5) Y19(5.5,-6.5) Y20(6.5,-6.5) Y21(7.5,-6.5) Y22(8.5,-6.5) Y23(9.5,-6.5) Y24(10.5,-6.5) Y25(11.5,-6.5) Y26(12.5,-6.5)
  silkscreen extent -15.2,-14 14,15.2, body extent -13.5,-13.5 13.5,13.5, height 3.5
CAPAE530X610N [mm]
  rect 3x1.8 smd: 1(-2.55,0) 2(2.55,0)
  silkscreen extent -4.05,-2.65 2.65,2.65, body extent -3.25,-2.75 3.25,2.75, height 6.1
CONN_73391-0070_MOL [mil]
  round 83 hole 63: 1(0,0) 2(-100,-100) 2(-100,100) 2(100,-100) 2(100,100)
  silkscreen extent -126,-126 126,126, body extent -120,-120 120,120, height 342
DFN500X600X100-15N [mil]
  rect 40x18 smd: 1(-92,94) 2(-92,63) 3(-92,31) 4(-92,0) 5(-92,-31) 6(-92,-63) 7(-92,-94) 8(92,-94) 9(92,-63) 10(92,-31) 11(92,0) 12(92,31) 13(92,63) 14(92,94)
  rect 130x201 smd: 4(0,0)
  silkscreen extent -144,-120 125,134, body extent -98,-118 98,118, height 43
DIOM5026X262N [mm]
  rect 2.2x1.55 smd: 1(-2.05,0) 2(2.05,0)
  silkscreen extent -2.83,-1.31 2.52,1.31, body extent -2.52,-1.31 2.52,1.31, height 2.62
DJK-02B [mm]
  rect 2x4.2 hole 0.8 slot 3.5 at 90 deg: 1(-3,-2.4)
  rect 4.2x2 hole 0.8 slot 3 at 0 deg: 2(0,2.4)
  rect 2x4.2 hole 0.8 slot 3 at 90 deg: 3(3,-2.4)
  silkscreen extent -4,-6.9 10.5,2.4, body extent -3.7,-6.85 10.7,2.45, height 11.1
ECPU1C154MA5 [mm]
  rect 0.9x1.4 smd: 1(-1.524,0) 2(1.524,0)
  silkscreen extent -0.7,-0.8 0.7,0.8, body extent -1.6,-0.8 1.6,0.8, height 0.8
HEADER_2_PHOENIX [mm]
  round 1.6 hole 1 unplated mask+0: 1(2.9,-4.6) 2(7.8,-4.6) GND(12.7,-4.6)
  silkscreen extent -0.6,-9.14 15.7,0.25, body extent -0.28,-8.3 15.28,-0.54, height 9.87
IPEX [mm]
  rect 0.2x0.41 smd: 1(3.048,-0.914)
  rect 0.53x0.835 smd: 2(2.159,-0.635) 2(2.159,0.762) 2(3.937,-0.635) 2(3.937,0.762)
  silkscreen extent 1.65,-1.27 4.44,1.4, body extent 2.05,-1.02 4.05,1.08, height 0.53
PBS-10 [mm]
  rect 1.6x1.6 hole 1: 1(-11.43,0)
  round 1.6 hole 1: 2(-8.89,0) 3(-6.35,0) 4(-3.81,0) 5(-1.27,0) 6(1.27,0) 7(3.81,0) 8(6.35,0) 9(8.89,0) 10(11.43,0)
  silkscreen extent -12.93,-1.38 12.82,2.19, body extent -12.7,-1.27 12.7,1.27, height 8.41
QFN50P900X900X80-65N-D [mm]
  rect 0.85x0.3 smd: 1(-4.45,3.75) 2(-4.45,3.25) 3(-4.45,2.75) 4(-4.45,2.25) 5(-4.45,1.75) 6(-4.45,1.25) 7(-4.45,0.75) 8(-4.45,0.25) 9(-4.45,-0.25) 10(-4.45,-0.75) 11(-4.45,-1.25) 12(-4.45,-1.75) 13(-4.45,-2.25) 14(-4.45,-2.75) 15(-4.45,-3.25) 16(-4.45,-3.75) 33(4.45,-3.75) 34(4.45,-3.25) 35(4.45,-2.75) 36(4.45,-2.25) 37(4.45,-1.75) 38(4.45,-1.25) 39(4.45,-0.75) 40(4.45,-0.25) 41(4.45,0.25) 42(4.45,0.75) 43(4.45,1.25) 44(4.45,1.75) 45(4.45,2.25) 46(4.45,2.75) 47(4.45,3.25) 48(4.45,3.75)
  rect 0.3x0.85 smd: 17(-3.75,-4.45) 18(-3.25,-4.45) 19(-2.75,-4.45) 20(-2.25,-4.45) 21(-1.75,-4.45) 22(-1.25,-4.45) 23(-0.75,-4.45) 24(-0.25,-4.45) 25(0.25,-4.45) 26(0.75,-4.45) 27(1.25,-4.45) 28(1.75,-4.45) 29(2.25,-4.45) 30(2.75,-4.45) 31(3.25,-4.45) 32(3.75,-4.45) 49(3.75,4.45) 50(3.25,4.45) 51(2.75,4.45) 52(2.25,4.45) 53(1.75,4.45) 54(1.25,4.45) 55(0.75,4.45) 56(0.25,4.45) 57(-0.25,4.45) 58(-0.75,4.45) 59(-1.25,4.45) 60(-1.75,4.45) 61(-2.25,4.45) 62(-2.75,4.45) 63(-3.25,4.45) 64(-3.75,4.45)
  rect 4.85x4.85 smd: 65(0,0)
  silkscreen extent -6.12,-5.2 5.2,6.12, body extent -4.55,-4.55 4.55,4.55, height 0.8
RESC1005X35N [mm]
  rect 0.7x0.6 smd: 1(-0.55,0) 2(0.55,0)
  body extent -0.5,-0.25 0.5,0.25, height 0.35
RESC3216X75N [mm]
  rect 1.2x1.8 smd: 1(-1.5,0) 2(1.5,0)
  silkscreen extent 0,-0.7 0,0.7, body extent -1.6,-0.8 1.6,0.8, height 0.75
SOIC127P600X175-8N [mm]
  rect 1.5x0.7 smd: 1(-2.7,1.905) 2(-2.7,0.635) 3(-2.7,-0.635) 4(-2.7,-1.905) 5(2.7,-1.905) 6(2.7,-0.635) 7(2.7,0.635) 8(2.7,1.905)
  silkscreen extent -3.45,-2.45 1.6,2.61, body extent -3,-2.45 3,2.45, height 1.75
SOP65P490X110-8N [mm]
  rect 1.45x0.45 smd: 1(-2.225,0.975) 2(-2.225,0.325) 3(-2.225,-0.325) 4(-2.225,-0.975) 5(2.225,-0.975) 6(2.225,-0.325) 7(2.225,0.325) 8(2.225,0.975)
  silkscreen extent -2.95,-1.5 1.15,1.55, body extent -2.45,-1.5 2.45,1.5, height 1.1
SOP65P640X120-28N [mm]
  rect 1.475x0.45 smd: 1(-2.938,4.225) 2(-2.938,3.575) 3(-2.938,2.925) 4(-2.938,2.275) 5(-2.938,1.625) 6(-2.938,0.975) 7(-2.938,0.325) 8(-2.938,-0.325) 9(-2.938,-0.975) 10(-2.938,-1.625) 11(-2.938,-2.275) 12(-2.938,-2.925) 13(-2.938,-3.575) 14(-2.938,-4.225) 15(2.938,-4.225) 16(2.938,-3.575) 17(2.938,-2.925) 18(2.938,-2.275) 19(2.938,-1.625) 20(2.938,-0.975) 21(2.938,-0.325) 22(2.938,0.325) 23(2.938,0.975) 24(2.938,1.625) 25(2.938,2.275) 26(2.938,2.925) 27(2.938,3.575) 28(2.938,4.225)
  silkscreen extent -3.67,-4.85 1.85,4.85, body extent -3.2,-4.85 3.2,4.85, height 1.2
SOT230P700X180-4N [mm]
  rect 1.75x0.95 smd: 1(-3.15,2.3) 2(-3.15,0) 3(-3.15,-2.3)
  rect 1.75x3.2 smd: 4(3.15,0)
  silkscreen extent -4.03,-3.25 1.75,3.25, body extent -3.5,-3.25 3.5,3.25, height 1.8
UART_CAN [mm]
  round 1.524 hole 1: 1(0,0) 2(2.55,0) 3(5.1,0) 5(10.2,0) 6(12.75,0) 7(13,-16) 8(10.45,-16) 9(7.9,-16) 10(5.35,-16) 11(2.8,-16) 12(0.25,-16)
  round 1.524 hole 1 unplated: 4(7.65,0)
  silkscreen extent -2.14,-17.53 14.22,2.16, body extent -1.27,-17.27 13.97,1.27, height 8.5

## Part data
C1 C2 C3 C4 C5 C6 C7 C8 C9 C10 C11 C12 C13 C14 C15 C16 C17 C18 C19 C20 C21 C22 C23 C24 C25 C26 C27 C28 C29 C30 C31 C32 C33 C34 C35 C36 C37 C38 C39 C40 C41 C42 C43 C44 C45 C46 C47 C48 C49 C50 C51 C52 C53 C54 C55 C56 C57 C58 C59 C60 C61 C62 C63 C64 C65 C66 C67 C68 C69 C70 C71 C72 C73 C74 C75 C76 C77 C78 C79 C80 C81 C82 C83 C84 C85 C86 C87 C88 C89 C91 C94 C96 C99 C100 C101 C102 C103 C104 C105 C112 C113 C122 C128 C130 C135: library part Capacitor_0.1u, ValueType=Конденсатор
C90 C92 C93 C95 C97 C98 C106 C107 C108 C109 C110 C111 C115 C116 C119 C120 C123 C127 C131 C132: library part Capacitor_0603, ValueType=Конденсатор
C114: library part Capacitor_pol_47u/16V, ValueType=Конденсатор
C118 C121 C125 C126: library part Capacitor_pol_220u/6.3V, ValueType=Конденсатор
C124 C129: library part Capacitor, ValueType=Конденсатор
DA1: library part opamp
DD1: library part PLIS
DD2: library part FLASH
DD3: library part ADC
DD9: library part DAC
HL1 HL2 HL3 HL4 HL5 HL6: Case=0603, Temp=-40...+85, ValueDescription=Светодиод, ValueManufacturer=Foryad, ValueManufacturerPartNumber=fyls-0603urc, ValueType=Светодиод
L1 L2: library part TRANSFORMER
L3: library part Inductor, ValueType=Индуктивность
R1 R2 R4 R7 R8 R9 R10 R11 R12 R13 R14 R15 R20 R30 R32 R33 R36 R37: library part Resistor, Case=0603, Power="0,1 Вт", Temp=-55*C..+155*C, Tolerance=5%, ValueManufacturer=Yageo, ValueManufacturerPartNumber=RC0603JR-07680RL, ValueType=Резистор
R3 R5 R6 R22: library part Resistor_1206_10k, Case=0603, Power="0,1 Вт", Temp=-55*C..+155*C, Tolerance=5%, ValueManufacturer=Yageo, ValueManufacturerPartNumber=RC0603JR-07680RL, ValueType=Резистор
R16 R17 R18 R19 R21 R23 R24 R25 R26 R27 R28 R29 R31 R34 R35: library part Resistor_0402_1k, Case=0603, Power="0,1 Вт", Temp=-55*C..+155*C, Tolerance=5%, ValueManufacturer=Yageo, ValueManufacturerPartNumber=RC0603JR-07680RL, ValueType=Резистор
VD1 VD2 VD3 VD4: library part "VD 1N41448"
VD10 VD11: library part DiodeSch_SS14-E3/61T, Case=DO-214AC(SMA), ValueDescription="Диод Шоттки", ValueManufacturer=Vishay, ValueManufacturerPartNumber=SS14-E3/61T, ValueType="Диод Шоттки"
XP1: library part "Header 10x1", Case=PBS-10, ValueType=Разъем
XP2 XP3 XP7: library part SMA_REAL
XP4: library part DJK-02B_PWR_CON, ValueManufacturer=KLS, ValueType="Разъем питания", ValueDescription=DJK-02B, ValueManufacturerPartNumber=DJK-02B
XP5: library part SMA_CLK

## Free pads (board coordinates)
  round 3 hole 3 unplated: 0(24.44,-25.092) 0(24.44,50.908) 0(74.44,-25.092) 0(124.44,-25.092) 0(124.44,50.908)

## Via types
v1: diameter 0.5, hole 0.25, Top Layer to Bottom Layer, 352 vias
v2: diameter 0.4, hole 0.25, Top Layer to Bottom Layer, 2 vias

## Nets (pads, with @x,y where several pads share a name; then routed paths per layer and width w, separated by ;. In a path a pad name is that pad's centre, name@x,y a point inside that pad or via, vN(x,y) a via of type N, cw(c..) or ccw(c..) an arc to the next point about the centre after c; other vN are vias at no path point)
5v_out: C124.1 DD7.3 | length 18.5
  Top Layer w0.254: C124.1@92.234,-14.018 v1(92.234,-11.478) ; DD7.3@103.969,-8.201 v1(105.417,-8.201)
  Signal Layer 1 w0.254: v1(92.234,-11.478) 95.511,-8.201 v1(105.417,-8.201)
5v_out_cap: C124.2 DD7.1 L3.1 VD10.1 VD11.1 | length 32.6
  Top Layer w0.254: VD10.1@95.282,-20.114 C124.2@95.282,-14.018
  Top Layer w0.3: VD11.1@90.202,-20.114 VD10.1@95.282,-20.114 ; C124.2@95.282,-14.018 97.314,-14.018 v1(100.362,-10.97) 103.312,-10.97 103.969,-10.313 DD7.1@103.969,-9.801 ; v1(106.966,-10.97) L3.1@111.03,-10.97 L3.1@110.98,-10.919
  Signal Layer 1 w0.3: v1(100.362,-10.97) v1(106.966,-10.97)
5v_out_l: C114.1 C116.1 C125.1 C126.1 C127.1 DD6.1 L3.2 R26.2 R30.2 | length 70.8
  Top Layer w0.4: R30.2@94.178,7.136 96.79,4.524 114.332,4.524 116.872,1.984 ; L3.2@111.03,-9.87 111.876,-9.87 113.22,-8.526 DD6.1@115.642,-8.526 115.642,-6.612 118.132,-4.122 C114.1@118.132,-1.572 118.132,0.724 116.872,1.984 ; C125.1@113.062,18.728 118.142,18.728 ; C126.1@122.714,18.728 118.142,18.728 ; 116.872,1.984 116.934,1.984 C116.1@120.348,5.398 C127.1@120.348,8.954 120.348,13.494 118.142,15.7 118.142,18.728
DA0: DD1.AF17 DD3.44 | length 5.2
  Top Layer w0.254: DD3.44@66.66,19.256 66.66,19.981 67.351,20.671 68.041,20.671 69.44,22.071 DD1.AF17@69.44,22.908
DA1: DD1.AE17 DD3.45 | length 6
  Top Layer w0.254: DD3.45@66.16,19.256 66.16,20.02 68.871,22.73 68.871,23.339 DD1.AE17@69.44,23.908
DA2: DD1.AF14 DD3.46 | length 4
  Top Layer w0.254: DD3.46@65.66,19.256 65.66,20.089 66.44,20.869 DD1.AF14@66.44,22.908
DA3: DD1.AE14 DD3.47 | length 5.2
  Top Layer w0.254: DD3.47@65.16,19.256 65.16,20.173 65.934,20.947 65.934,23.402 DD1.AE14@66.44,23.908
DA4: DD1.AF13 DD3.48 | length 4
  Top Layer w0.254: DD3.48@64.66,19.256 64.66,20.232 65.44,21.012 DD1.AF13@65.44,22.908
DA5: DD1.AE13 DD3.49 | length 6
  Top Layer w0.254: DD3.49@63.96,18.556 63.96,20.929 64.952,21.921 64.952,22.698 64.946,22.704 64.946,23.414 DD1.AE13@65.44,23.908
DA6: DD1.AE12 DD3.50 | length 6.9
  Top Layer w0.254: DD3.50@63.96,18.056 63.937,18.079 63.503,18.079 63.281,18.301 63.281,20.857 63.944,21.52 63.944,23.412 DD1.AE12@64.44,23.908
DA7: DD1.AE11 DD3.51 | length 7.5
  Top Layer w0.254: DD1.AE11@63.44,23.908 62.934,23.402 62.934,21.049 62.758,20.872 62.758,18.105 63.307,17.556 DD3.51@63.96,17.556
DA8: DD1.AF10 DD3.54 | length 8
  Top Layer w0.254: DD1.AF10@62.44,22.908 62.44,21.094 62.346,20.999 62.346,16.861 63.151,16.056 DD3.54@63.96,16.056
DA9: DD1.AE10 DD3.55 | length 9.9
  Top Layer w0.254: DD1.AE10@62.44,23.908 61.946,23.414 61.946,16.677 63.067,15.556 DD3.55@63.96,15.556
DA10: DD1.AF9 DD3.56 | length 9.6
  Top Layer w0.254: DD1.AF9@61.44,22.908 61.44,16.319 62.703,15.056 DD3.56@63.96,15.056
DA11: DD1.AE9 DD3.57 | length 11.6
  Top Layer w0.254: DD1.AE9@61.44,23.908 60.934,23.402 60.934,16.216 62.594,14.556 DD3.57@63.96,14.556
DAC_D0: DD1.AB26 DD9.14 | length 6.8
  Top Layer w0.254: DD1.AB26@78.44,26.908 79.363,26.908 82.582,30.128 DD9.14@82.582,31.41
DAC_D1: DD1.AA26 DD9.13 | length 6.6
  Top Layer w0.254: DD1.AA26@78.44,27.908 80.065,29.533 80.065,30.836 81.289,32.06 DD9.13@82.582,32.06
DAC_D2: DD1.Y26 DD9.12 | length 6.3
  Top Layer w0.254: DD1.Y26@78.44,28.908 79.684,30.152 79.684,31.069 81.326,32.71 DD9.12@82.582,32.71
DAC_D3: DD1.W26 DD9.11 | length 5.8
  Top Layer w0.254: DD1.W26@78.44,29.908 79.303,30.771 79.303,31.227 81.437,33.36 DD9.11@82.582,33.36
DAC_D4: DD1.V26 DD9.10 | length 5.4
  Top Layer w0.254: DD1.V26@78.44,30.908 81.52,33.988 82.56,33.988 DD9.10@82.582,34.01
DAC_D5: DD1.U26 DD9.9 | length 5.3
  Top Layer w0.254: DD1.U26@78.44,31.908 81.192,34.66 DD9.9@82.582,34.66
DAC_D6: DD1.N26 DD9.8 | length 4.4
  Top Layer w0.254: DD1.N26@78.44,35.908 80.408,35.908 81.006,35.31 DD9.8@82.582,35.31
DAC_D7: DD1.K26 DD9.7 | length 5.4
  Top Layer w0.254: DD1.K26@78.44,38.908 81.388,35.96 DD9.7@82.582,35.96
DAC_D8: DD1.J26 DD9.6 | length 5.5
  Top Layer w0.254: DD1.J26@78.44,39.908 81.738,36.61 DD9.6@82.582,36.61
DAC_D9: DD1.H26 DD9.5 | length 5.9
  Top Layer w0.254: DD1.H26@78.44,40.908 80.042,39.306 80.042,38.814 81.596,37.26 DD9.5@82.582,37.26
DAC_D10: DD1.G26 DD9.4 | length 6.4
  Top Layer w0.254: DD1.G26@78.44,41.908 80.423,39.925 80.423,38.972 81.485,37.91 DD9.4@82.582,37.91
DAC_D11: DD1.F26 DD9.3 | length 6.8
  Top Layer w0.254: DD1.F26@78.44,42.908 80.804,40.544 80.804,39.13 81.374,38.56 DD9.3@82.582,38.56
DAC_D12: DD1.E26 DD9.2 | length 7
  Top Layer w0.254: DD1.E26@78.44,43.908 81.185,41.163 81.185,39.627 81.602,39.21 DD9.2@82.582,39.21
DAC_D13: DD1.D26 DD9.1 | length 6.8
  Top Layer w0.254: DD1.D26@78.44,44.908 82.582,40.766 DD9.1@82.582,39.86
DB0: DD1.AC26 DD3.25 | length 14.2
  Top Layer w0.254: DD3.25@72.86,15.056 73.841,15.056 78.934,20.15 78.934,24.113 78.899,24.148 78.899,24.669 78.934,24.704 78.934,25.113 78.899,25.148 78.899,25.449 DD1.AC26@78.44,25.908
DB1: DD1.AE25 DD3.26 | length 11.7
  Top Layer w0.254: DD3.26@72.86,15.556 73.802,15.556 78.518,20.272 78.518,22.83 DD1.AE25@77.44,23.908
DB2: DD1.AE24 DD3.27 | length 10.4
  Top Layer w0.254: DD3.27@72.86,16.056 73.764,16.056 76.994,19.287 76.994,22.656 76.946,22.704 76.946,23.113 76.994,23.161 76.994,23.354 DD1.AE24@76.44,23.908
DB3: DD1.AF23 DD3.30 | length 7
  Top Layer w0.254: DD3.30@72.86,17.556 72.864,17.56 73.836,17.56 75.44,19.165 DD1.AF23@75.44,22.908
DB4: DD1.AE23 DD3.31 | length 7.5
  Top Layer w0.254: DD3.31@72.86,18.056 73.793,18.056 74.946,19.21 74.946,23.414 DD1.AE23@75.44,23.908
DB5: DD1.AF22 DD3.32 | length 5.5
  Top Layer w0.254: DD3.32@72.86,18.556 73.754,18.556 74.44,19.242 DD1.AF22@74.44,22.908
DB6: DD1.AE22 DD3.33 | length 5.6
  Top Layer w0.254: DD3.33@72.16,19.256 72.16,20.518 73.946,22.304 73.946,23.414 DD1.AE22@74.44,23.908
DB7: DD1.AF21 DD3.34 | length 4.4
  Top Layer w0.254: DD3.34@71.66,19.256 71.66,20.526 73.44,22.306 DD1.AF21@73.44,22.908
DB8: DD1.AE21 DD3.35 | length 5.6
  Top Layer w0.254: DD3.35@71.16,19.256 71.16,20.534 72.93,22.304 72.93,23.398 DD1.AE21@73.44,23.908
DB9: DD1.AF20 DD3.36 | length 4.4
  Top Layer w0.254: DD3.36@70.66,19.256 70.66,20.593 72.44,22.373 DD1.AF20@72.44,22.908
DB10: DD1.AE20 DD3.37 | length 5.6
  Top Layer w0.254: DD3.37@70.16,19.256 70.16,20.652 71.934,22.426 71.934,23.113 71.914,23.133 71.914,23.382 DD1.AE20@72.44,23.908
DB11: DD1.AF19 DD3.38 | length 4.4
  Top Layer w0.254: DD3.38@69.66,19.256 69.66,21.128 DD1.AF19@71.44,22.908
EXT_CLOCK: DD1.P26 DD3.18 DD3.63 DD9.28 R20.2 XP5.1 | length 59.7
  Top Layer w0.254: v2(63.04,11.56) 63.956,11.56 DD3.63@63.96,11.556 63.964,11.552 65.733,11.552 65.952,11.771 70.369,11.771 70.584,11.556 DD3.18@72.86,11.556 72.864,11.552 75.132,11.552 v1(75.47,11.89) ; DD1.P26@78.44,34.908 v1(79.438,34.908) ; v1(82.328,27.638) XP5.1@83.598,27.638 ; v1(86.177,39.85) 86.187,39.86 DD9.28@88.458,39.86 88.458,41.388 89.694,42.624 R20.2@90.924,42.624
  Signal Layer 1 w0.254: v1(75.47,11.89) 75.47,20.78 v1(82.328,27.638) 79.438,30.528 v1(79.438,34.908) 84.772,34.908 86.177,36.313 v1(86.177,39.85)